# Altium PCB Motor-42.PcbDoc
Units mm, origin at the board's own origin, x right, y up, seen from the top; angles counter-clockwise.
Board outline 41.2 x 41.2 mm, 4 copper layers (Top1, Signal2, Gnd3, Bottom4), stack 0.778 mm thick; 84 components, 66 nets, 263 pads, 200 vias.
Unrouted connection lines stored in the file: 54.
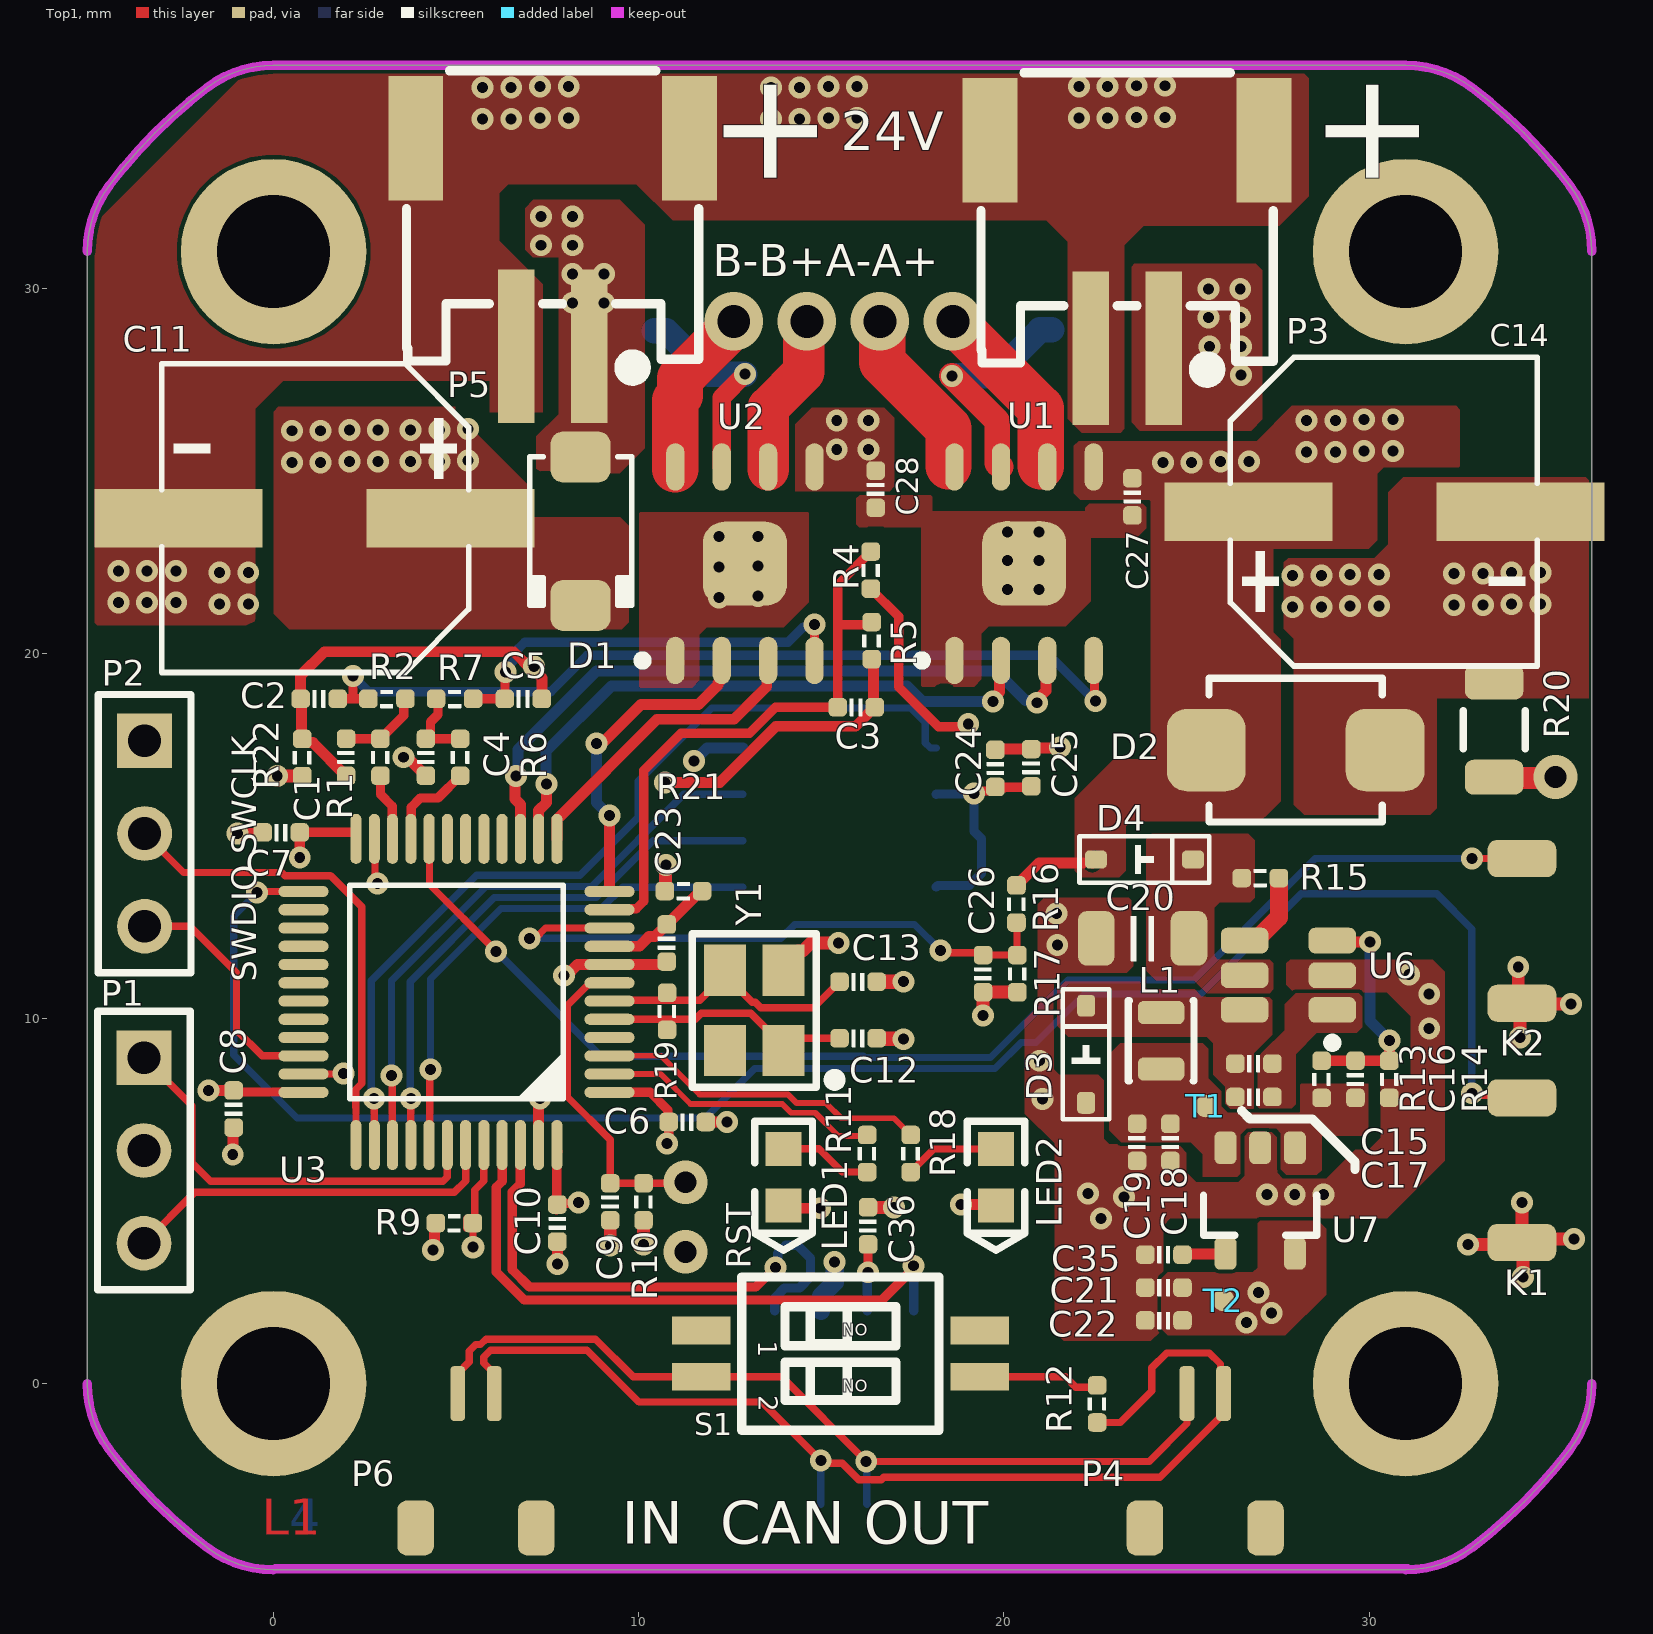
[diagram p0: Top1 view]
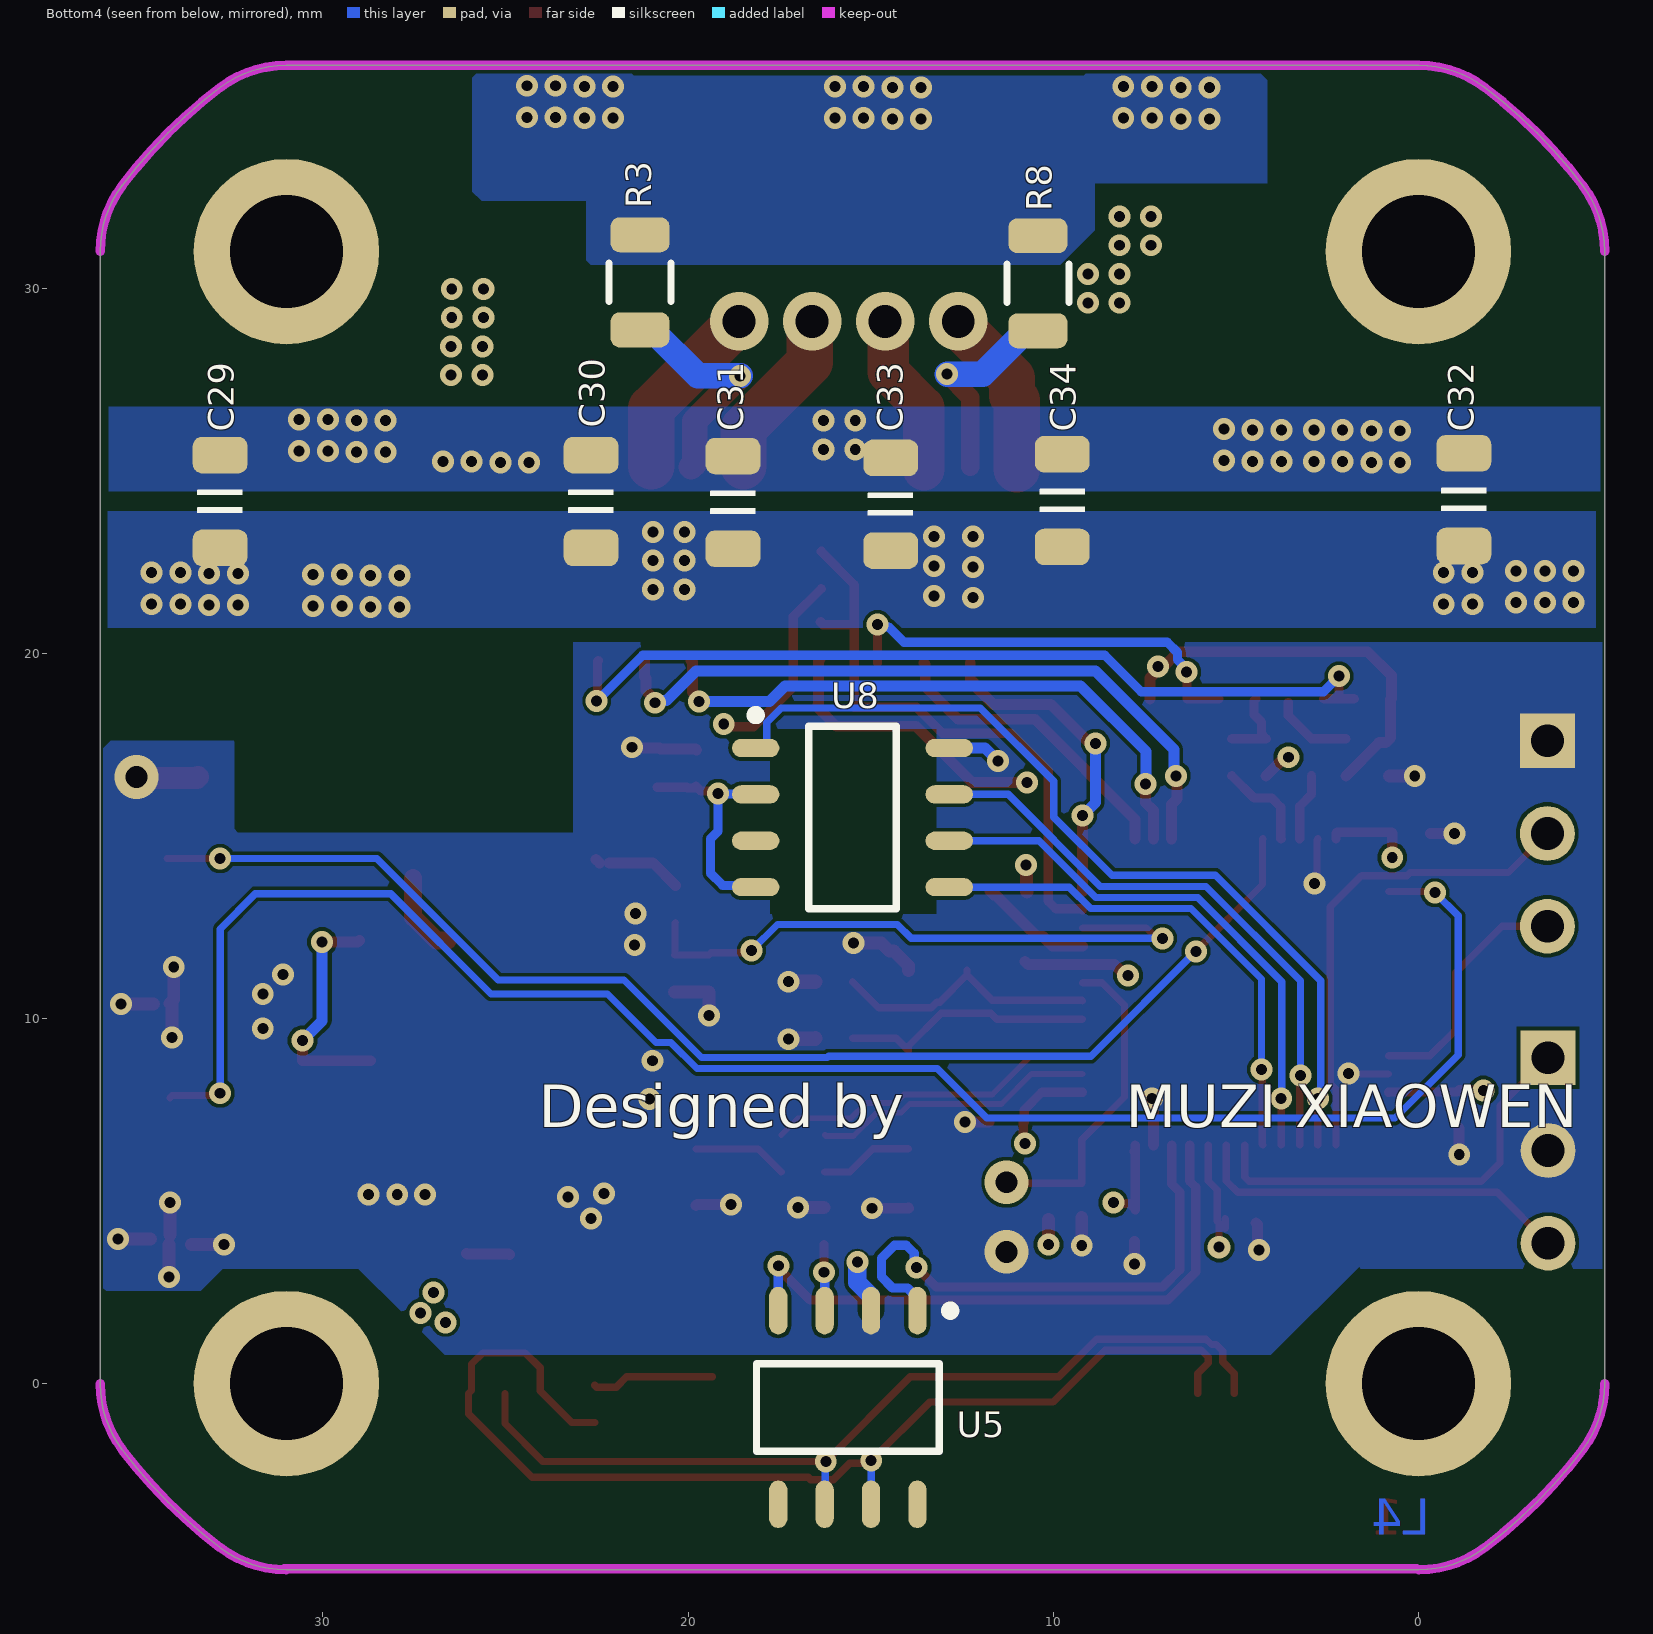
[diagram p1: Bottom4 view, seen from below]
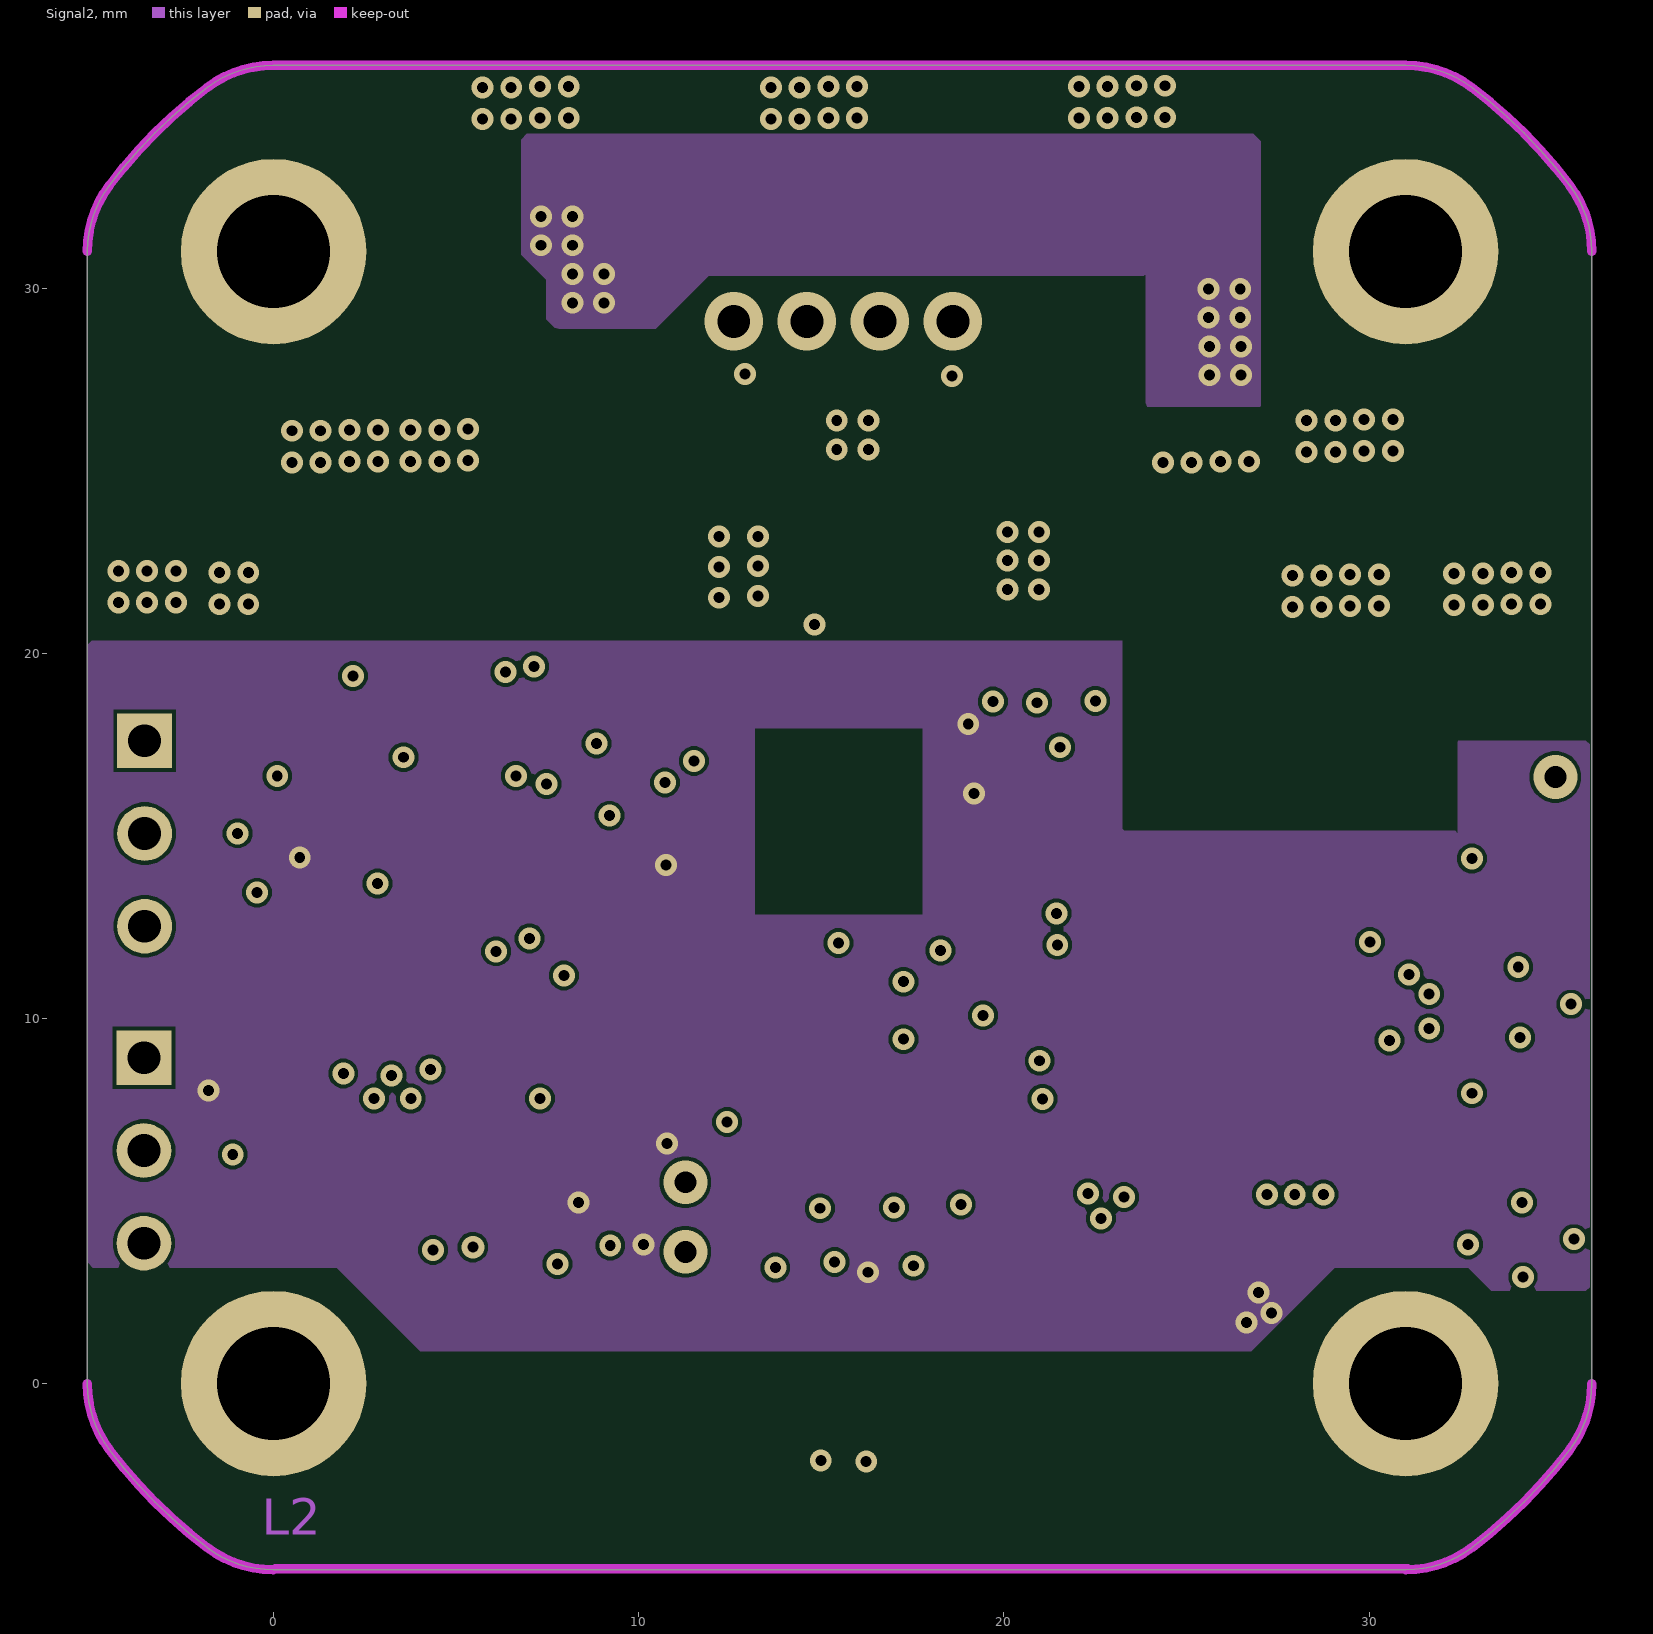
[diagram p2: Signal2]
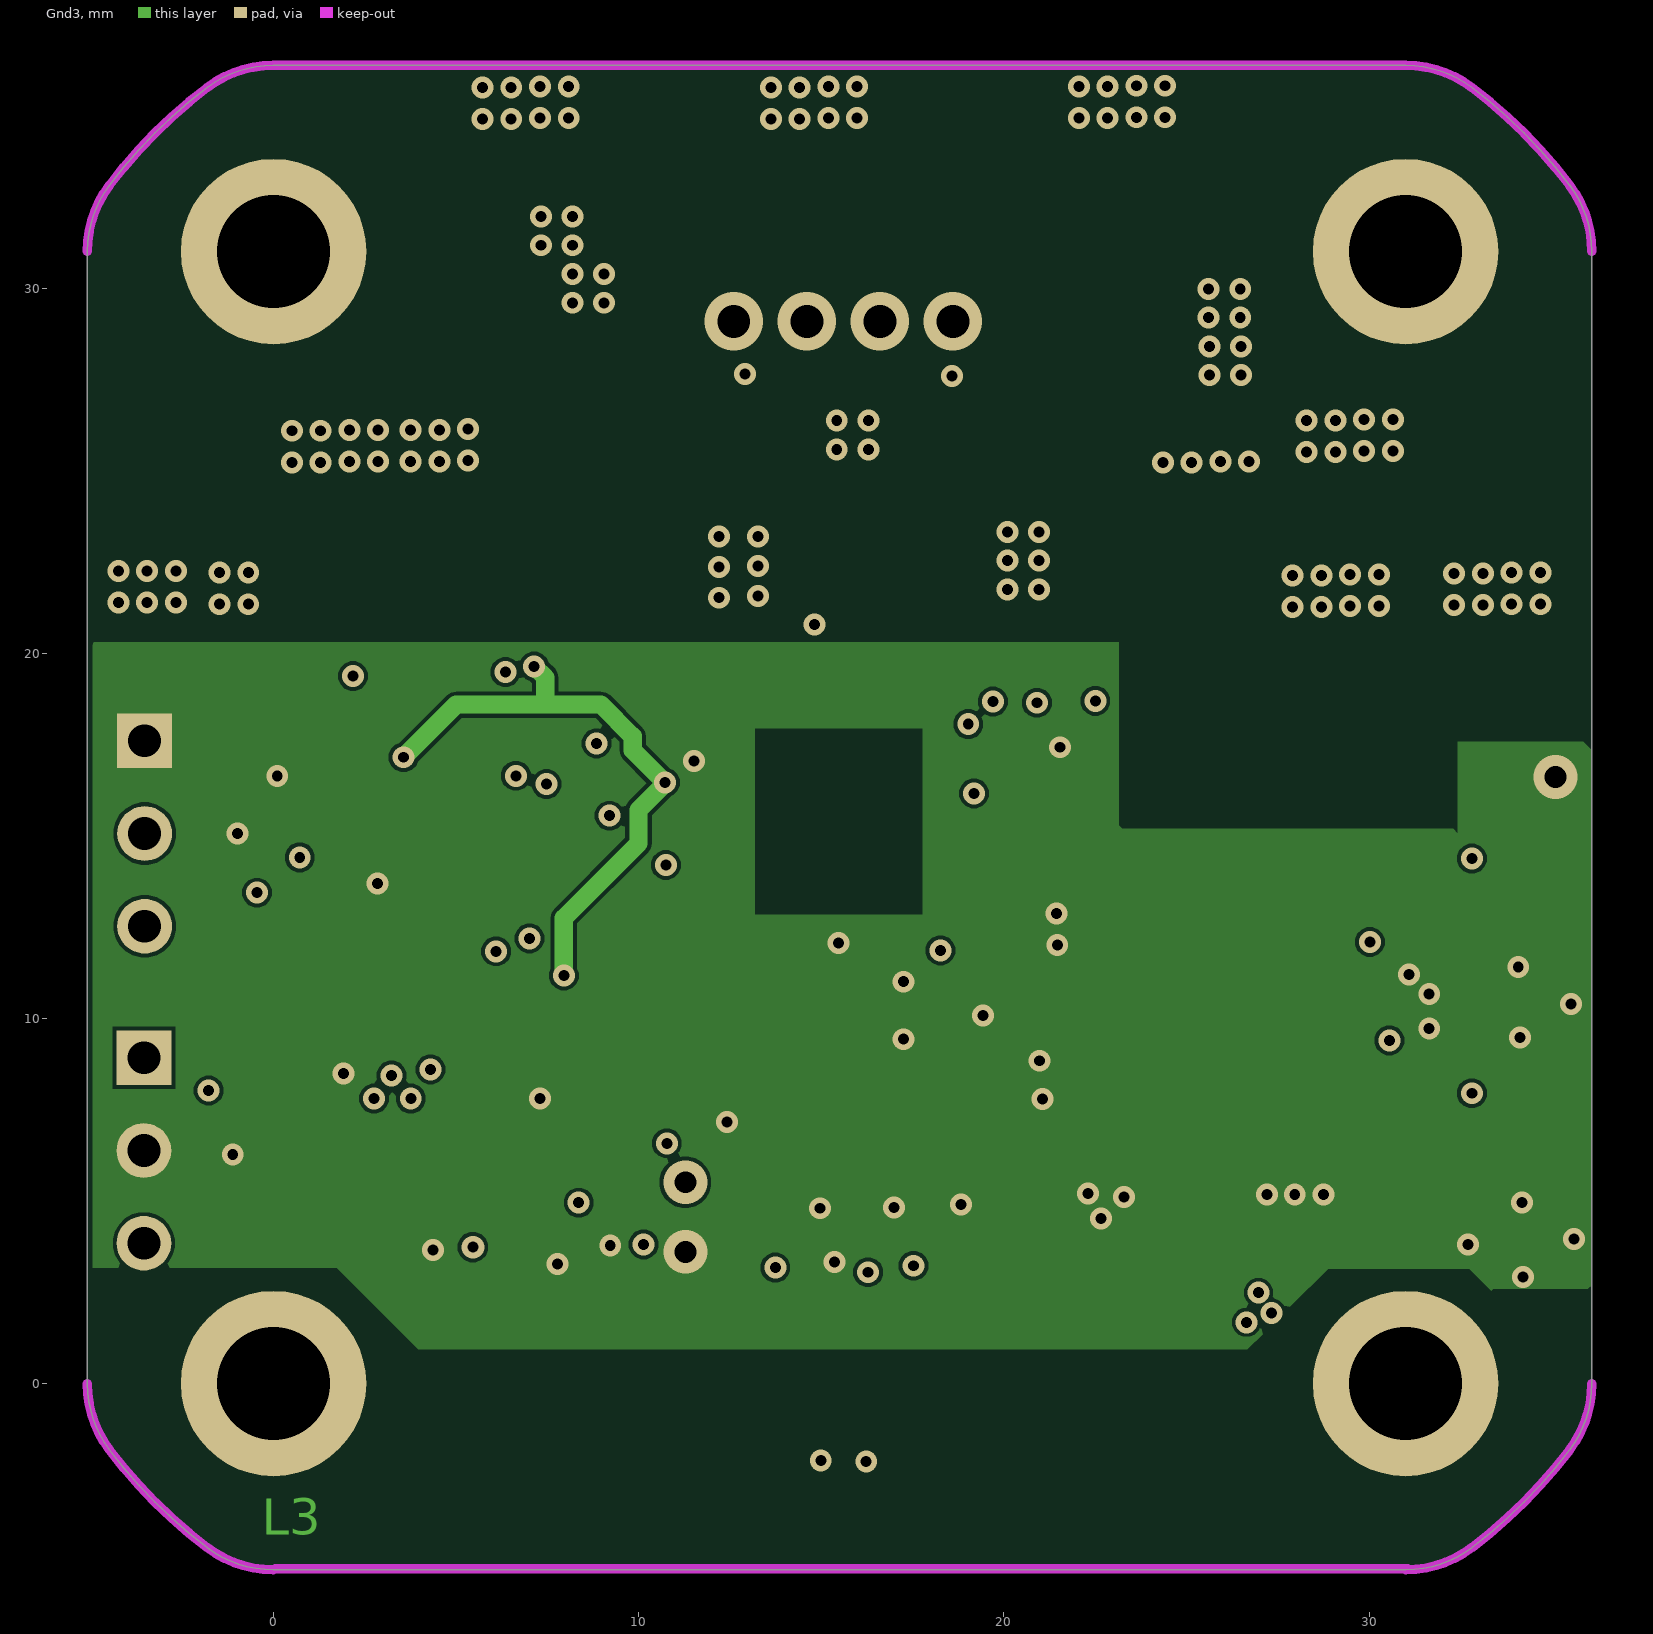
[diagram p3: Gnd3]
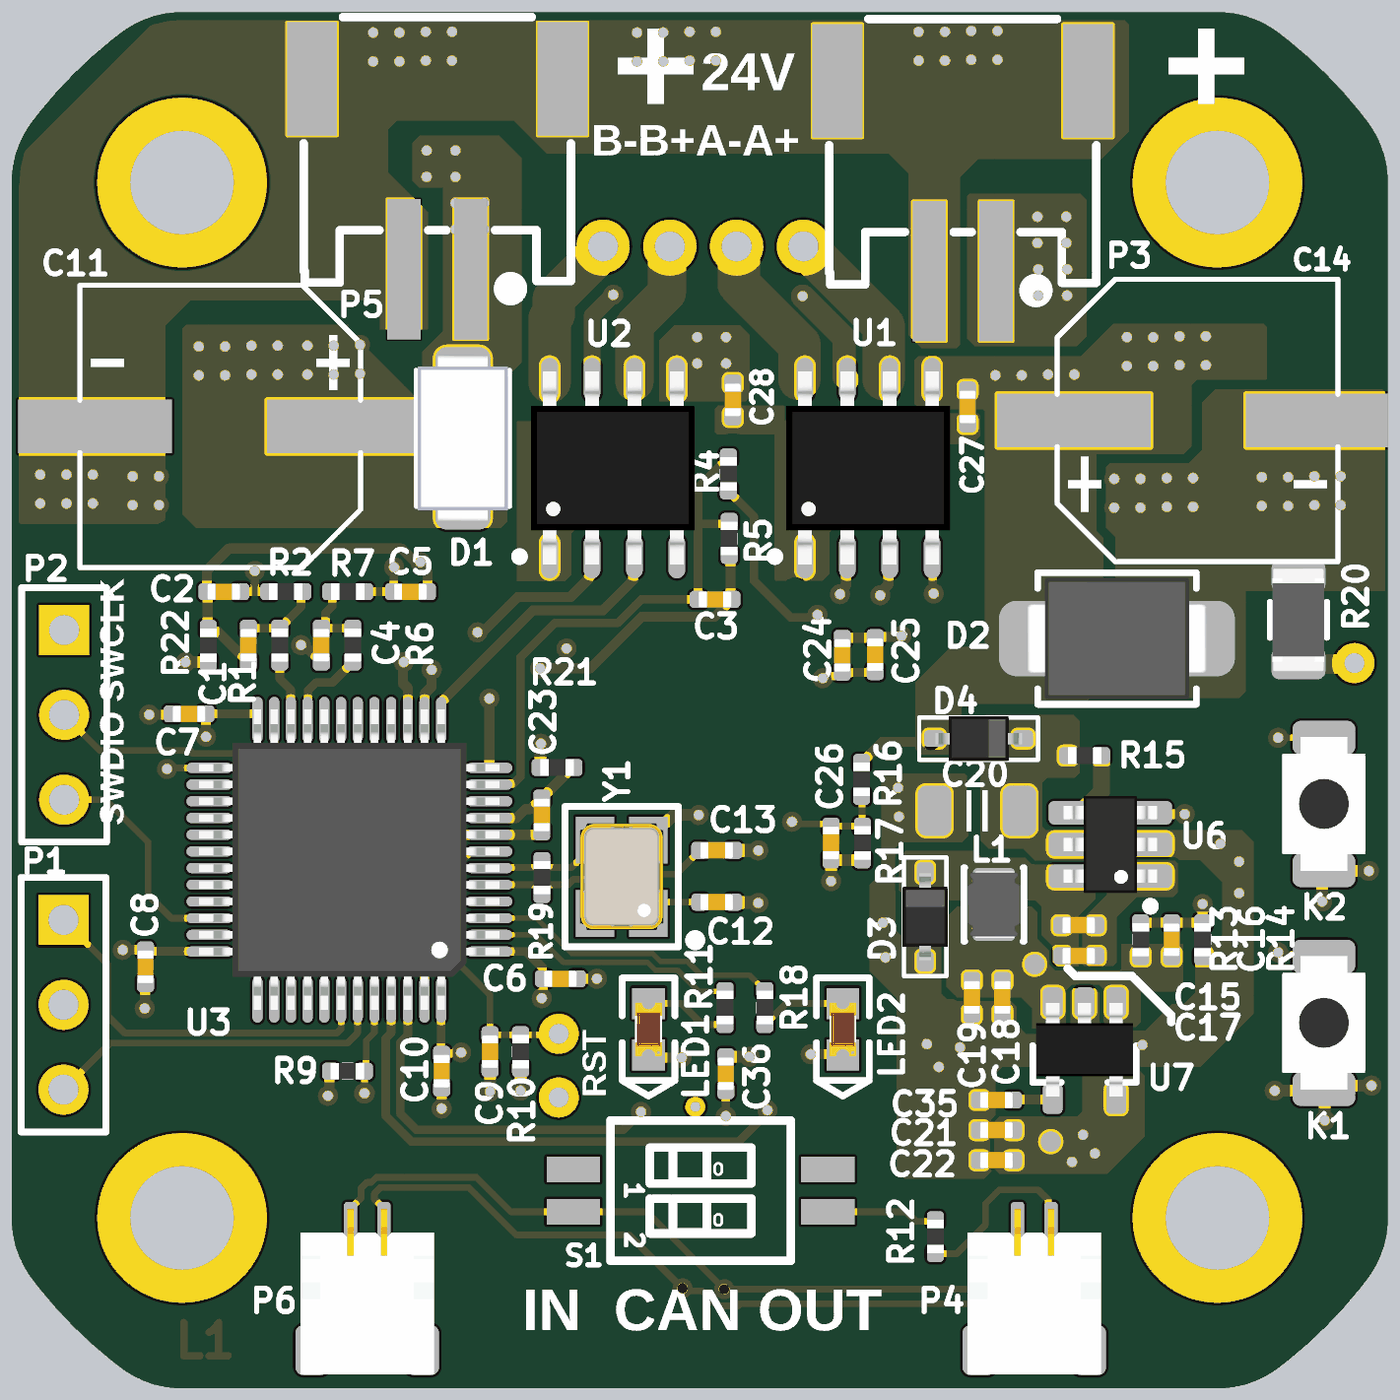
[diagram p4: 3D render of the assembled board from above, using the file's embedded part models]
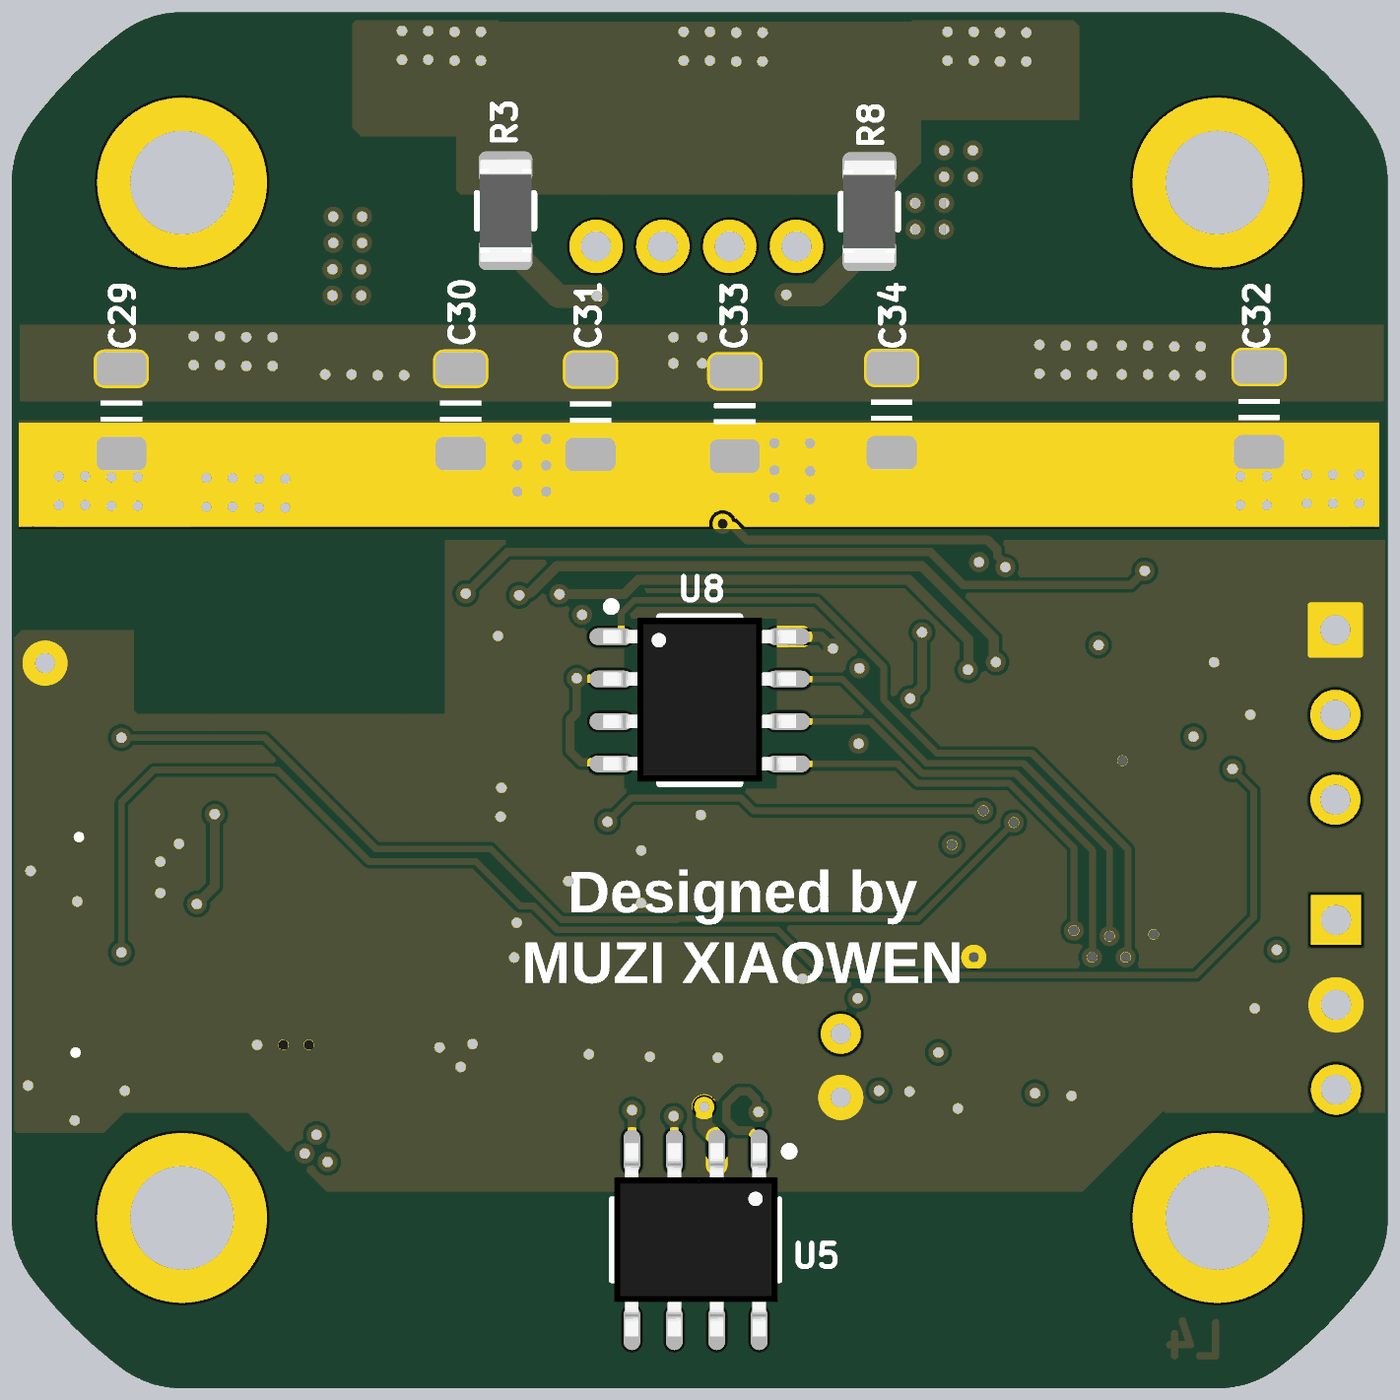
[diagram p5: 3D render of the assembled board from below, using the file's embedded part models]

## Layer stack, top to bottom
Top Solder: solder mask 0.0102, Solder Resist, Dk 3.5
Top1: signal copper 0.0356
Dielectric1: core 0.254, FR-4, Dk 4.2
Signal2: signal copper 0.036
Dielectric2: core 0.254, Dk 4.2
Gnd3: signal copper 0.036
Dielectric3: prepreg 0.127, Dk 4.2
Bottom4: signal copper 0.0356
Bottom Solder: solder mask 0.0102, Solder Resist, Dk 3.5

## Board outline
-4.493,-1.816 cw(c-2.1,-0.006) -5.1,-0.006 -5.1,23 -5.1,31.006 cw(c-2.1,31.006) -4.493,32.816 cw(c6.5,24.5) -1.816,35.493 cw(c-0.006,33.1) -0.006,36.1 31.006,36.1 cw(c31.006,33.1) 32.816,35.493 cw(c24.5,24.5) 35.493,32.816 cw(c33.1,31.006) 36.1,31.006 36.1,-0.006 cw(c33.1,-0.006) 35.493,-1.816 cw(c24.5,6.5) 32.816,-4.493 cw(c31.006,-2.1) 31.006,-5.1 -0.006,-5.1 cw(c-0.006,-2.1) -1.816,-4.493 cw(c6.5,6.5)

## Design rules (kind name [scope] priority, off if disabled: settings)
Clearance [All] p1: gap=0.102 ignorepadtopadclearanceinfootprint=FALSE except(0: Arc-Hole Track-Hole SMDPad-Hole THPad-Hole Via-Hole Fill-Hole Poly-Hole Region-Hole Text-Hole)
ComponentClearance [All] p1: gap=0 collisioncheckmode=3 verticalgap=0 showdistances=FALSE
DiffPairsRouting [All] p1: maxlimit=0.229 minlimit=0.229 mostfreqgap=0.229 toplayer_minwidth=0.381 toplayer_maxwidth=0.381 toplayer_prefwidth=0.381 midlayer1_minwidth=0.381 midlayer1_maxwidth=0.381 midlayer1_prefwidth=0.381 midlayer2_minwidth=0.381 midlayer2_maxwidth=0.381 midlayer2_prefwidth=0.381 bottomlayer_minwidth=0.381 bottomlayer_maxwidth=0.381 bottomlayer_prefwidth=0.381 maxuncoupledlength=12.7
FanoutControl Fanout_BGA [All] p1: bgadir=Out bgaviamode=Centered fanoutstyle=Auto fanoutdirection=Alternating viagrid=0.025 // Fanout_BGA (Default Rule)
HoleSize [All] p1: absolutevalues=TRUE maxlimit=254 minlimit=0.203 maxpercent=80.000 minpercent=20.000
MinimumSolderMaskSliver [All] p1 off: minsoldermaskwidth=0.051
PlaneClearance [All] p1: clearance=0.203
PlaneConnect [All] p1: planeconnectstyle=Direct reliefexpansion=0.508 reliefentries=4 reliefconductorwidth=0.254 reliefairgap=0.254
PolygonConnect [All] p1: connectstyle=Direct reliefconductorwidth=0.254 reliefentries=4 polygonreliefangle="90 Angle" airgapwidth=0.254
RoomDefinition Port [InComponentClass('Port')] p1 off: confinementstyle=ConfineIn formatcopy=TRUE lockcomponents=FALSE outline -160.798,-86.681 -109.998,-86.681 -109.998,-61.281 -160.798,-61.281
RoomDefinition MCU [InComponentClass('MCU')] p2 off: confinementstyle=ConfineIn formatcopy=TRUE lockcomponents=FALSE outline -160.798,-86.681 -109.998,-86.681 -109.998,-61.281 -160.798,-61.281
RoomDefinition Interface [InComponentClass('Interface')] p3 off: confinementstyle=ConfineIn formatcopy=TRUE lockcomponents=FALSE outline -160.798,-86.681 -109.998,-86.681 -109.998,-61.281 -160.798,-61.281
RoomDefinition Drive [InComponentClass('Drive')] p4 off: confinementstyle=ConfineIn formatcopy=TRUE lockcomponents=FALSE outline -160.798,-86.681 -109.998,-86.681 -109.998,-61.281 -160.798,-61.281
RoomDefinition Power [InComponentClass('Power')] p5 off: confinementstyle=ConfineIn formatcopy=TRUE lockcomponents=FALSE outline -160.798,-86.681 -109.998,-86.681 -109.998,-61.281 -160.798,-61.281
RoutingVias [All] p1: holewidth=0.203 width=0.406 viastyle="Through Hole" minholewidth=0.152 minwidth=0.305 maxholewidth=0.711 maxwidth=1.27
SilkToSilkClearance [All] p1: silktosilkclearance=0
SilkToSolderMaskClearance [IsPad] p1: minsilkscreentomaskgap=0 clearancetoexposedcopper=TRUE
SolderMaskExpansion [All] p1: expansion=0.076 istentingtop=FALSE
Width GND [(InNet('AGND') OR InNet('GND'))] p1: maxlimit=1.27 minlimit=0.102 preferedwidth=0.254
Width VCC [(InNet('VDD_SYS_3.3V') OR InNet('VDD_AV_3.3V') OR InNet('VDD_5V') OR InNet('VDD1V2-SYS') OR InNet('VDD1V1-EPHY') OR InNet('VDD-CPUX') OR InNet('VDD-CPUS') OR InNet('VDD-CPUFB') OR InNet('VCC-DRAM'))] p2: maxlimit=1.27 minlimit=0.102 preferedwidth=0.254
Width [All] p3: maxlimit=254 minlimit=0.102 preferedwidth=0.102
21 further rules are at their usual default settings.

## Classes and differential pairs
component class Port: C36 K1 K2 P1 P2 P3 P4 P5 P6 R12 S1 U5
component class MCU: C6 C7 C8 C9 C10 C12 C13 C23 LED1 LED2 R9 R10 R11 R18 R19 R21 R22 U3 Y1
component class Interface: C24 C25 C26 R16 R17 U8
component class Drive: C1 C2 C3 C4 C5 C27 C28 R1 R2 R3 R4 R5 R6 R7 R8 R20 U1 U2
component class Power: C11 C14 C15 C16 C17 C18 C19 C20 C21 C22 C29 C30 C31 C32 C33 C34 C35 D1 D2 D3 D4 L1 R13 R14 R15 T1 T2 U6 U7

## Components (designator, comment, footprint, x,y, rotation, side; value= is the part's Value field where it differs from the comment)
C1 "0.1uF" CAP_0402 1.987,17.151 r90 top value=0.1u
C2 "0.1uF" CAP_0402 1.251,18.751 r0 top value=0.1u
C3 "10uF" CAP_0402 15.957,18.523 r180 top value=0.1u
C4 "0.1uF" CAP_0402 4.172,17.151 r90 top value=0.1u
C5 "0.1uF" CAP_0402 6.839,18.751 r180 top value=0.1u
C6 "0.1uF" CAP_0402 11.328,7.163 r180 top value=0.1u
C7 "0.1uF" CAP_0402 0.209,15.094 r0 top value=0.1u
C8 "0.1uF" CAP_0402 -1.092,7.518 r90 top value=0.1u
C9 "0.1uF" CAP_0402 9.22,4.978 r90 top value=0.1u
C10 "10uF" CAP_0402 7.772,4.394 r90 top value=0.1u
C11 "220uF/25V" CAP-SMD_BD8.0-L8.3-W8.3-LS9.3-FD 1.118,23.698 r180 top value=220uF/35V
C12 "20pF" CAP_0402 16.008,9.455 r0 top
C13 "20pF" CAP_0402 16.008,11.004 r0 top
C14 "220uF/25V" CAP-SMD_BD8.0-L8.3-W8.3-LS9.3-FD 30.429,23.876 r0 top value=220uF/35V
C15 "0.1uF" CAP_0402 26.848,8.763 r0 top value=0.1u
C16 "100pF" CAP_0402 29.629,8.331 r90 top value=0.1u
C17 "0.1uF" CAP_0402 26.848,7.849 r0 top value=0.1u
C18 "0.1uF" CAP_0402 24.562,6.604 r90 top value=0.1u
C19 "10uF" CAP_0402 23.647,6.604 r90 top value=0.1u
C20 "10uF/50V" 1206-CAP 23.8,12.192 r0 top value=0.1u
C21 "0.1uF" CAP_0402 24.384,2.629 r0 top value=0.1u
C22 "10uF" CAP_0402 24.384,1.727 r0 top value=0.1u
C23 "0.1uF" CAP_0402 10.77,12.065 r90 top value=0.1u
C24 "10uF" CAP_0402 19.767,16.846 r270 top value=0.1u
C25 "0.1uF" CAP_0402 20.752,16.866 r270 top value=0.1u
C26 "0.1uF" CAP_0402 19.431,11.227 r90 top value=0.1u
C27 "0.1uF" CAP_0402 23.52,24.282 r90 top value=0.1u
C28 "0.1uF" CAP_0402 16.491,24.492 r90 top value=0.1u
C29 "10uF/50V" 1206-CAP 32.817,24.155 r270 bottom
C30 "10uF/50V" 1206-CAP 22.657,24.155 r270 bottom
C31 "10uF/50V" 1206-CAP 18.771,24.13 r270 bottom
C32 "10uF/50V" 1206-CAP -1.245,24.206 r270 bottom
C33 "10uF/50V" 1206-CAP 14.453,24.079 r270 bottom
C34 "10uF/50V" 1206-CAP 9.754,24.181 r270 bottom
C35 "0.1uF" CAP_0402 24.384,3.531 r0 top value=0.1u
C36 "0.1uF" CAP_0402 16.281,4.318 r270 top value=0.1u
D1 "SS54" DO-214AC 8.407,23.343 r270 top
D2 "SMBJ28CA" SMBJ-CA_MFG 27.991,17.348 r180 top
D3 "二极管-5819W" SOD-323 22.25,9.017 r90 top
D4 "二极管-5819W" SOD-323 23.851,14.351 r0 top
K1 "TACT 2P" ButtonTACT_3x4x2_180 34.188,5.842 r90 top value=3x4
K2 "TACT 2P" ButtonTACT_3x4x2_180 34.188,12.395 r90 top value=3x4
L1 "6.8uH" IND-201612 24.308,9.384 r270 top
LED1 "LED GREEN" LED-0603 13.919,5.639 r90 top
LED2 "LED GREEN" LED-0603 19.736,5.639 r90 top
P1 "Header 3" HDR1X3 -3.55,8.921 r270 top
P2 "Header 3" HDR1X3 -3.531,17.602 r270 top
P3 "Header 4" CONN-SMD_2P-P2.00_HDGC_HDGC2001WR-S-2P 23.374,31.197 r180 top
P4 "SH1.0-2P" SH1.0-2P 25.516,-0.273 r0 top
P5 "Header 4" CONN-SMD_2P-P2.00_HDGC_HDGC2001WR-S-2P 7.642,31.253 r180 top locked
P6 "SH1.0-2P" SH1.0-2P 5.543,-0.273 r0 top
R1 "1K" RES_0402 2.927,17.151 r90 top value=22R
R2 "1K" RES_0402 3.105,18.751 r180 top value=22R
R3 "0.1R" 1206-RES 21.317,30.156 r90 bottom value=22R
R4 "NCP15XH103F03RC" RES_0402 16.358,22.276 r270 top value=10k
R5 "3.3K" RES_0402 16.383,20.345 r90 top value=22R
R6 "1K" RES_0402 5.111,17.151 r90 top value=22R
R7 "1K" RES_0402 4.959,18.751 r0 top value=22R
R8 "0.1R" 1206-RES 10.42,30.13 r90 bottom value=22R
R9 "10K" RES_0402 4.953,4.394 r180 top value=22R
R10 "10K" RES_0402 10.135,4.978 r270 top value=22R
R11 "1K" RES_0402 16.256,6.299 r270 top value=22R
R12 "120R" RES_0402 22.555,-0.559 r90 top value=22R
R13 "10K" RES_0402 28.702,8.331 r270 top value=22R
R14 "1.8K" RES_0402 30.556,8.331 r90 top value=22R
R15 "1M" RES_0402 27.026,13.843 r0 top value=22R
R16 "10K" RES_0402 20.345,13.132 r270 top value=22R
R17 "1K" RES_0402 20.371,11.227 r270 top value=22R
R18 "1K" RES_0402 17.45,6.299 r270 top value=22R
R19 "1M" RES_0402 10.776,10.191 r270 top value=22R
R20 "0R" 1206-RES 33.426,17.907 r90 top
R21 "0" RES_0402 11.227,13.487 r180 top value=0R
R22 "0" RES_0402 0.787,17.145 r90 top value=0R
S1 "SW DIP-2" SW-SMD_DSHP02TS-S 15.525,0.819 r270 top
T1 "测试点" TEST_PT 25.527,7.594 r0 top
T2 "测试点" TEST_PT 26.01,2.286 r90 top
U1 "TB67H450FNG" SO-8-PAD 20.555,22.451 r0 top locked
U2 "TB67H450FNG" SO-8-PAD 12.909,22.451 r0 top locked
U3 "STM32F103CBT6" LQFP-48 5.01,10.725 r0 top locked
U5 "SN65HVD232D" so-8 15.627,-0.654 r90 bottom
U6 "ME3116" SOT23-6 27.794,11.182 r90 top
U7 "LP2992 3V3" SOT23-5 27.02,4.958 r180 top
U8 "MT6816" SO-8 15.5,15.5 r180 bottom locked
Y1 "XTAL-4" LC-SMD-3225_4P 13.163,10.217 r90 top value="12 MHz"

## Footprints (in the part's own frame and the unit in brackets; to place one, negate y for a bottom-side part, rotate by r counter-clockwise, add the part's x,y. Pads: shape width x height; smd on the part's side, far side on the other; paste and mask are expansions set on the pad)
1206-CAP [mm]
  rrect50% 1x1.5 smd: 1(-1.27,0) 2(1.27,0)
  silkscreen extent -0.3,-0.61 0.3,0.61, body extent -1.5,-0.75 1.5,0.75, height 1.5
1206-RES [mm]
  rrect50% 0.956x1.61 smd paste+0 mask+0: 1(-1.301,0) 2(1.301,0)
  silkscreen extent -0.52,-0.85 0.52,0.85, body extent -1.55,-0.77 1.55,0.77, height 0.65
ButtonTACT_3x4x2_180 [mil]
  rrect50% 40x74 smd: 1(-78,0) 2(78,0)
  body extent -79,-49 79,49, height 63
CAP-SMD_BD8.0-L8.3-W8.3-LS9.3-FD [mm]
  rect 4.6x1.6 smd: 1(-3.724,0) 2(3.724,0)
  silkscreen extent -4.23,-4.23 4.18,4.23
CAP_0402 [mil]
  rrect50% 20x20 smd: 1(-20,0) 2(20,0)
  silkscreen extent -7,-9 7,9, body extent -20,-10 20,10, height 20
CONN-SMD_2P-P2.00_HDGC_HDGC2001WR-S-2P [mm]
  rect 1x4.2 smd paste+0 mask+0.05: 1(-1,2.85) 2(1,2.85)
  rect 1.5x3.4 smd paste+0 mask+0.05: 3(3.75,-2.85) 4(-3.75,-2.85)
  silkscreen extent -4,-4.7 4,3.68
DO-214AC [mil] "SMA"
  rrect50% 55x65 smd: 1(-80,0) 2(80,0)
  silkscreen extent -80,-55 80,55, body extent -98,-53 98,53, height 85
HDR1X3 [mm] "Connector; Header; 3 Position"
  rect 1.5x1.5 hole 0.9: 1(0,0)
  round 1.5 hole 0.9: 2(2.54,0) 3(5.08,0)
  silkscreen extent -1.27,-1.27 6.35,1.27
IND-201612 [mm]
  rrect50% 0.635x1.27 smd paste+0 mask+0: 1(-0.774,0) 2(0.774,0)
  silkscreen extent -1.1,-0.9 1.1,0.9, body extent -1,-0.8 1,0.8, height 0.95
LC-SMD-3225_4P [mm]
  rect 1.4x1.15 smd: 1(-1.1,-0.8) 2(1.1,-0.8) 3(1.1,0.8) 4(-1.1,0.8)
  silkscreen extent -2.1,-2.35 2.1,1.7, body extent -1.6,-1.25 1.6,1.25, height 0.61
LED-0603 [mm]
  rect 0.93x0.98 smd: A(0.782,-0.048) C(-0.758,-0.048)
  silkscreen extent -1.99,-0.84 1.55,0.74, body extent -0.79,-0.45 0.81,0.35, height 0.6
LQFP-48 [mil]
  oval 54x12 smd: 1(165,-108.27) 2(165,-88.58) 3(165,-68.9) 4(165,-49.21) 5(165,-29.53) 6(165,-9.84) 7(165,9.84) 8(165,29.53) 9(165,49.21) 10(165,68.9) 11(165,88.58) 12(165,108.27) 25(-165,108.27) 26(-165,88.58) 27(-165,68.9) 28(-165,49.21) 29(-165,29.53) 30(-165,9.84) 31(-165,-9.84) 32(-165,-29.53) 33(-165,-49.21) 34(-165,-68.9) 35(-165,-88.58) 36(-165,-108.27)
  oval 12x54 smd: 13(108.27,165) 14(88.58,165) 15(68.9,165) 16(49.21,165) 17(29.53,165) 18(9.84,165) 19(-9.84,165) 20(-29.53,165) 21(-49.21,165) 22(-68.9,165) 23(-88.58,165) 24(-108.27,165) 37(-108.27,-165) 38(-88.58,-165) 39(-68.9,-165) 40(-49.21,-165) 41(-29.53,-165) 42(-9.84,-165) 43(9.84,-165) 44(29.53,-165) 45(49.21,-165) 46(68.9,-165) 47(88.58,-165) 48(108.27,-165)
  silkscreen extent -115,-115 115,115, body extent -177,-177 177,177, height 61
RES_0402 [mil]
  rrect50% 20x20 smd: 1(-20,0) 2(20,0)
  silkscreen extent -7,-10 7,10, body extent -20,-10 20,10, height 14
SH1.0-2P [mm]
  rrect50% 0.4x1.5 smd: 1(-0.5,0) 2(0.5,0)
  rrect50% 1x1.5 smd: SH1(-1.651,-3.683) SH2(1.651,-3.683)
  body extent -2,-4.42 2,0.54, height 3.06
SMBJ-CA_MFG [mm]
  rrect50% 2.16x2.26 smd paste+0 mask+0: 1(-2.45,0) 2(2.45,0)
  silkscreen extent -2.37,-1.97 2.37,1.97, body extent -2.7,-1.81 2.7,1.81, height 2.62
so-8 [mm]
  oval 1.3x0.5 smd: 1(2.65,-1.905) 2(2.65,-0.635) 3(2.65,0.635) 4(2.65,1.905) 5(-2.65,1.905) 6(-2.65,0.635) 7(-2.65,-0.635) 8(-2.65,-1.905)
  silkscreen extent -1.2,-2.93 2.77,2.5, body extent -2.89,-2.46 2.89,2.44, height 1.45
SO-8 [mm]
  oval 1.3x0.5 smd: 1(-2.65,1.905) 2(-2.65,0.635) 3(-2.65,-0.635) 4(-2.65,-1.905) 5(2.65,-1.905) 6(2.65,-0.635) 7(2.65,0.635) 8(2.65,1.905)
  silkscreen extent -2.78,-2.5 1.2,2.93, body extent -2.89,-2.44 2.89,2.46, height 1.45
SO-8-PAD [mm]
  oval 0.5x1.3 smd: 1(-1.905,-2.65) 2(-0.635,-2.65) 3(0.635,-2.65) 4(1.905,-2.65) 5(1.905,2.65) 6(0.635,2.65) 7(-0.635,2.65) 8(-1.905,2.65)
  rrect50% 2.3x2.3 smd: 9(0,0)
  silkscreen extent -2.93,-2.77 -2.68,-2.53, body extent -2.46,-2.89 2.44,2.89, height 1.45
SOD-323 [mm]
  rrect50% 0.6x0.5 smd: 1(-1.329,0) 2(1.329,0)
  silkscreen extent -1.78,-0.64 1.78,0.64, body extent -1.3,-0.68 1.3,0.67, height 1.15
SOT23-5 [mm] "SOT23, 3-Leads, Body 3.1x3.0mm (max), Pitch 0.95mm, IPC Medium Density"
  rrect50% 0.6x0.889 smd: 1(-0.95,-1.5) 2(0,-1.5) 3(0.95,-1.5) 4(0.95,1.396) 5(-0.95,1.396)
  silkscreen extent -1.55,-0.2 1.55,0.9, body extent -1.45,-1.48 1.45,1.32, height 1.2
SOT23-6 [mm]
  rrect50% 0.7x1.3 smd: 1(-0.95,-1.2) 2(0,-1.2) 3(0.95,-1.2) 4(0.95,1.2) 5(0,1.2) 6(-0.95,1.2)
  silkscreen extent -1.97,-1.33 -1.73,-1.08, body extent -1.45,-1.4 1.45,1.4, height 1.45
SW-SMD_DSHP02TS-S [mm]
  rect 0.762x1.6 smd: 1(0.635,3.81) 2(-0.635,3.81) 3(-0.635,-3.81) 4(0.635,-3.81)
  silkscreen extent -2.1,-2.7 2.1,2.7
TEST_PT [mm]
  rrect100% 0.606x0.606 smd: 0(0,0)

## Part data
C1 C2 C3 C4 C5 C6 C7 C8 C9 C10 C12 C13 C15 C16 C17 C18 C19 C20 C21 C22 C23 C24 C25 C26 C27 C28 C35 C36: library part 电容-0402, "Capacitor"
C11 C14 C29 C30 C31 C32 C33 C34: library part CAP, "Capacitor, chip, ceramic", Parameters="E22 CAP", PN=RVT1E221M0607, Price=0.038
D1: library part Diode_SMA, "Diode", Type=SMA
D3 D4: "40V"
K1 K2: library part ButtonTACT_3x4x2_180, "Button", Type="TACT 2P"
L1: library part 电感-201612
LED1 LED2: library part LED, "LED GRN SGL RA 25mA 4.1V SMD", AGILE_PN=370-76642, CAD_APPROVED=Yes, CLASS=IC, HEIGHT=4.25MM, MFG_NAME01=Kingbright, MFG_PN01=AA4040ZGS, PN=19-217/G7C-AN1P2/3T, RoHS=Yes
P1 P2: "Header, 3-Pin", LatestRevisionDate=17-Jul-2002, LatestRevisionNote="Re-released for DXP Platform.", Publisher="Altium Limited"
P3 P5: "Header, 4-Pin", LatestRevisionDate=17-Jul-2002, LatestRevisionNote="Re-released for DXP Platform.", Publisher="Altium Limited"
R1 R2 R5 R6 R7 R9 R10 R11 R12 R13 R14 R15 R16 R17 R18 R19 R21 R22: library part 电阻-0402, "Resistor"
R3 R8 R20: library part 电阻-1206, "Resistor"
R4: "THERMISTOR 10K OHM NTC 0402 SMD"
S1: "DIP Switch, 2 Position, SPST", LatestRevisionDate=17-Jul-2002, LatestRevisionNote="Re-released for DXP Platform.", PackageReference=DIP-4, Published=24-Mar-1999, Publisher="Altium Limited"
U1 U2: "PWM Chopper Type DC Brushed Motor Driver"
U3: "ARM Cortex-M3 32-bit MCU, 128 KB Flash, 20 KB Internal RAM, 37 I/Os, 48-pin LQFP, -40 to 85 degC, Tray", I/Os (High Current)=37, Operating Frequency(F) (Processor speed) (MHz)=72, Supplier Part Number 1=497-6288-ND, Supply Voltage(Vcc) min (V)=2, A/D Converter="2x12-bit (10 Channel)", ComponentLink1Description="Manufacturer URL", ComponentLink1URL=http://www.st.com/web/en/home.html, ComponentLink2Description=Datasheet, ComponentLink2URL=http://www.st.com/st-web-ui/static/active/en/resource/technical/document/datasheet/CD00161566.pdf, ComponentLink3Description="Package Specification", ComponentLink3URL=http://www.st.com/st-web-ui/static/active/en/resource/technical/document/datasheet/DM00058181.pdf, Core="ARM Cortex-M3", DatasheetVersion="Rev. 16", FLASH Size (Prog) (kB)=128, Internal RAM Size (kB)=20, Mounting Technology="Surface Mount", PackageDescription="48-Pin Low Profile Quad Flat Package, 7 x 7 mm Body, 0.5 mm Pitch", PackageReference=LQFP48, PackageVersion="Rev. 6, 06/2013", Packing=Tray, PartNumber=STM32F103CBT6, Supplier 1=Digi-Key, Supplier 2=Farnell, Supplier 3=Newark, Supplier 4=Newark, Supplier 5=Mouser, Supplier Part Number 2=1606327, Supplier Part Number 3=11N8296, Supplier Part Number 4=57P1214, Supplier Part Number 5=511-STM32F103CBT6
U5: Manufacturer="Texas Instruments", Manufacturer Part Number=SN65HVD232DR, Operating Temperature="-40°C ~ 85°C", Package / Case="8-SOIC (0.154\", 3.90mm Width)", Supplier Device Package=8-SOIC, Supplier Part Number 1=296-26344-2-ND, Voltage - Supply="3 V ~ 3.6 V", Category="Integrated Circuits (ICs)", ComponentLink1Description=http://www.ti.com/lit/ds/symlink/sn65hvd230.pdf, ComponentLink1URL=http://www.ti.com/lit/ds/symlink/sn65hvd230.pdf, Data Rate=1Mbps, Duplex=Half, Mounting Type="Surface Mount", Number of Drivers/Receivers=1/1, Packaging="Tape & Reel (TR)", Part Status=Active, Pricing 1="2500=0.84375 (USD)", Pricing 2="1=2.05, 10=1.842, 100=1.4809, 500=1.21668, 1000=1.00811 (USD)", Protocol=CAN, RoHS="RoHS Compliant", Stock=5000, Supplier 1=Digi-Key, Supplier 2=Digi-Key, Supplier Part Number 2=296-26344-1-ND, Type=Transceiver
U6: "DC-DC"
U7: library part LP2992, "LDO"
U8: "Magnetic Position Sensor"
Y1: "Crystal", Distributors=Comet, Parameters="20ppm 20pF -20/+70C", Price=0.238

## Free pads (board coordinates)
  round 5.08 hole 3.1: ""(0,0) ""(0,31) ""(31,0) ""(31,31)

## Via types
v1: diameter 0.6, hole 0.3, Top1 to Bottom4, tented both sides, 190 vias
v2: diameter 1.6, hole 0.9, Top1 to Bottom4, 4 vias
v3: diameter 1.2, hole 0.6, Top1 to Bottom4, 3 vias
v4: diameter 0.6, hole 0.3, Top1 to Bottom4, 2 vias
v5: diameter 0.62, hole 0.3, Top1 to Bottom4, tented bottom, 1 vias

## Nets (pads, with @x,y where several pads share a name; then routed paths per layer and width w, separated by ;. In a path a pad name is that pad's centre, name@x,y a point inside that pad or via, vN(x,y) a via of type N, cw(c..) or ccw(c..) an arc to the next point about the centre after c; other vN are vias at no path point)
ADC_ENC: U3.16
AGND: C1.1 C2.1 C3.1 C4.1 C5.1 C23.1 R5.1 R22.2 U3.8 | length 39.3
  Top1 w0.3: C1.1 1.081,17.549 0.891,17.549 R22.2 0.765,17.675 0.765,18.729 C2.1 0.743,19.386 1.397,20.041 6.579,20.041 v1@7.061,19.558 ; v1(3.562,17.151) 3.619,17.094 3.721,17.094 C4.1 ; v1(7.137,19.634) 7.195,19.577 7.195,19.475 7.347,19.323 C5.1 ; v1(7.95,11.176) 8.031,11.176 8.329,11.474 9.2,11.474 U3.8 U3.8 10.688,11.476 C23.1 ; v1(10.72,16.459) 12.219,16.459 13.76,18 15.943,18 C3.1 16.424,18.564 16.424,19.796 R5.1
  Gnd3 w0.5: v1(3.562,17.151) 5.004,18.593 7.442,18.593 ; v1(7.137,19.634) 7.442,19.329 7.442,18.593 ; v1(7.95,11.176) 7.95,12.751 9.994,14.794 9.994,15.706 10.72,16.432 v1(10.72,16.459) 9.834,17.346 9.834,17.725 8.966,18.593 7.442,18.593
BUTTON_1: K1.2 U3.25 | length 49.4
  Top1 w0.2: v1@-0.356,13.475 U3.25 ; v1(32.817,7.95) 32.88,7.887 34.125,7.887 K1.2
  Bottom4 w0.2: v1(-0.451,13.443) -1.086,12.808 -1.086,8.998 0.641,7.27 11.819,7.27 13.175,8.626 19.759,8.626 20.473,9.341 20.879,9.341 22.206,10.668 25.4,10.668 28.143,13.411 31.852,13.411 32.817,12.446 v1(32.817,7.95)
BUTTON_2: K2.2 U3.20 | length 35.5
  Top1 w0.2: U3.20 4.268,14.907 4.268,13.664 v1(6.096,11.836) ; v1(32.817,14.376) K2.2 K2.2@34.265,14.376
  Bottom4 w0.2: v1(6.096,11.836) 8.966,8.966 16.153,8.966 16.192,8.928 19.634,8.928 21.755,11.049 25.197,11.049 28.524,14.376 v1(32.817,14.376)
CAN_H: P4.2 P6.2 R12.1 U5.7 | length 30.9
  Top1 w0.2: P6.2 6.043,0.277 5.757,0.562 5.757,0.728 5.944,0.914 8.585,0.914 10.008,-0.508 13.386,-0.508 v1(14.986,-2.108) 15.063,-2.185 15.572,-2.185 16.023,-2.635 16.643,-2.635 16.713,-2.565 24.274,-2.565 26.016,-0.823 P4.2 25.933,-0.191 25.933,0.533 25.629,0.838 24.46,0.838 24.054,0.432 24.054,-0.203 23.19,-1.067 R12.1
  Bottom4 w0.2: v1(14.986,-2.108) 14.989,-2.111 14.989,-3.301 U5.7
CAN_L: P4.1 P6.1 S1.4 U5.6 | length 24.9
  Top1 w0.2: P6.1 5.043,0.277 5.359,0.593 5.359,0.889 5.537,1.067 5.669,1.067 5.819,1.216 8.817,1.216 9.849,0.184 13.913,0.184 v1(16.231,-2.134) 23.978,-2.134 25.016,-1.096 P4.1
  Bottom4 w0.2: v1(16.231,-2.134) 16.246,-2.149 16.246,-3.289 U5.6
CAN_RX: U3.45 U5.4 | length 17
  Top1 w0.254: U3.45 6.26,5.538 6.096,5.375 6.096,3.053 6.863,2.286 16.662,2.286 17.526,3.15 v1(17.526,3.226)
  Bottom4 w0.254: v1(17.526,3.226) 17.529,3.223 17.529,1.999 U5.4
CAN_TX: U3.46 U5.1 | length 14.8
  Top1 w0.254: U3.46 6.76,5.467 6.538,5.246 6.538,3.114 7.01,2.642 13.208,2.642 v1(13.741,3.175)
  Bottom4 w0.254: U5.1 13.722,2.344 13.994,2.616 14.402,2.616 14.707,2.921 14.707,3.429 14.351,3.785 14.024,3.785 13.805,3.566 13.805,3.239 v1(13.741,3.175)
GND: C6.1 C7.1 C8.1 C9.1 C10.1 C12.2 C13.2 C18.1 C19.1 C20.1 C21.1 C22.1 C24.1 C25.1 C26.1 C35.1 C36.1 D3.1 K1.1 K2.1 LED1.C LED2.C P1.2 P2.1 R9.2 R14.1 R17.2 R20.1 R22.1 U3.23 U3.35 U3.47 U5.2 U6.2 U7.2 U8.8 Y1.2 | length 28.4
  Top1 w0.2: U3.35 v1@1.82,8.475 ; U3.23 2.78,14.896 2.78,13.756 v1(2.845,13.691)
  Top1 w0.3: v1(-1.118,6.274) -1.105,6.286 -1.105,6.998 C8.1 ; v1@-0.807,15.068 C7.1@-0.324,15.068 ; v1(4.369,3.658) 4.407,3.696 4.407,4.356 R9.2 ; U3.47 U3.47 7.261,7.769 v4(7.296,7.804) ; v1(7.772,3.277) C10.1 ; C6.1@11.76,7.163 v1@12.243,7.163 ; LED1.C@13.967,4.804 13.971,4.801 v1(14.961,4.801) ; v1(18.821,4.902) 19.762,4.902 LED2.C ; C24.1 19.786,17.373 C25.1 20.777,17.399 21.514,17.399 v1(21.539,17.424)
  Top1 w0.354: v1(0.102,16.637) R22.1 ; v1(9.22,3.785) C9.1@9.22,4.547 ; Y1.2 13.963,11.442 14.361,11.84 14.486,11.84 14.711,12.065 v1(15.469,12.065) ; C36.1 v1@16.891,4.826 ; v1(19.431,10.084) C26.1 R17.2 ; v1(32.715,3.81) K1.1@33.604,3.81 ; v1(34.087,11.405) 34.087,10.516 K2.1 ; v1(34.138,9.474) K2.1@34.138,10.363 ; K1.1@34.188,4.064 v1(34.188,4.953) ; v1(34.214,2.921) K1.1@34.214,3.81 ; K2.1@34.646,10.389 v1(35.535,10.389) ; K1.1@34.722,3.962 v1(35.611,3.962)
  Top1 w0.39: C12.2 16.529,9.442 17.24,9.442 v1(17.253,9.429) ; C13.2 v1(17.253,11.004)
  Top1 w0.6: R20.1 33.446,16.586 v3@35.027,16.586
  Bottom4 w0.3: v1(11.512,17.049) 11.868,17.405 U8.8
  Bottom4 w0.5: U5.2 14.992,2.396 15.367,2.771 v4(15.367,3.327)
  other v1: 22.657,4.521 16.993,4.826 23.292,5.105 27.203,5.182 27.965,5.182 28.753,5.182 22.301,5.207 12.421,7.163 21.057,7.798 1.911,8.49 20.98,8.839 31.648,9.728 31.648,10.668 31.09,11.201 21.463,12.014 21.438,12.878 -0.985,15.068
  other v3: 11.278,3.607 35.103,16.612
IN_AM: U1.2 U3.14 | length 16.9
  Top1 w0.3: U3.14 U3.14 7.261,15.694 7.474,15.906 v1(7.474,16.414) ; v1(19.7,18.675) 19.7,18.756 19.881,18.938 19.881,19.763 U1.2
  Bottom4 w0.3: v1(7.474,16.414) 7.459,16.429 7.459,17.314 9.252,19.107 17.343,19.107 17.775,18.675 v1(19.7,18.675)
IN_AP: U1.3 U3.15 | length 19.3
  Top1 w0.3: v1(6.635,16.643) 6.61,16.618 6.61,16.008 6.759,15.859 U3.15@6.759,14.917 ; v1(20.904,18.644) 20.904,18.725 21.151,18.972 21.151,19.309 21.19,19.347 U1.3 ; U3.15@6.759,14.917 U3.15
  Bottom4 w0.3: v1(6.635,16.643) 6.693,16.7 6.693,17.361 8.845,19.513 19.781,19.513 20.593,18.701 20.847,18.701 v1(20.904,18.644)
IN_BM: U2.2 U3.12 | length 8.8
  Top1 w0.3: v1@8.896,17.43 10.06,18.594 11.634,18.594 12.174,19.134 12.174,19.179 12.274,19.279 U2.2@12.274,19.733 ; U3.12 v1(9.201,15.551)
  Bottom4 w0.3: v1(8.845,17.532) 8.845,15.906 v1(9.201,15.551)
IN_BP: U2.3 U3.13 | length 8.4
  Top1 w0.3: U3.13 7.76,15.449 10.503,18.192 12.604,18.192 13.506,19.094 13.506,19.695 U2.3@13.544,19.733
IN_PWM_A: R1.1 U3.22 | length 1.9
  Top1 w0.254: R1.1 2.927,16.135 3.25,15.812 3.25,14.926 U3.22
IN_PWM_B: R6.1 U3.21 | length 2.6
  Top1 w0.254: U3.21 3.77,14.926 3.77,15.784 4.019,16.033 4.502,16.033 R6.1
MT6816_AUX_CS: U3.17
MT6816_CS: U3.38 U8.1 | length 24.5
  Top1 w0.2: v1(2.749,7.804) 2.755,7.798 2.755,6.539 U3.38
  Bottom4 w0.2: v1(2.749,7.804) 2.673,7.88 2.673,11.03 5.559,13.916 8.394,13.916 9.988,15.51 9.988,16.491 11.995,18.497 17.456,18.497 17.85,18.103 17.85,17.544 17.989,17.405 U8.1
NetC1_2: C1.2 R1.2 R2.1 | length 2.2
  Top1 w0.254: C1.2 R1.2 3.562,18.294 R2.1@3.562,18.65
NetC4_2: C4.2 R6.2 R7.1 | length 2.2
  Top1 w0.254: R7.1 4.502,18.7 4.502,18.319 4.299,18.116 4.299,17.786 C4.2 R6.2
NetC9_2: C9.2 R10.1 U3.7 | length 8.5
  Top1 w0.2: U3.7 8.667,10.975 8.052,10.36 8.052,7.848 9.22,6.68 C9.2 R10.1 10.973,5.486 v3@10.998,5.512
  other v3: 11.278,5.512
NetC12_1: C12.1 R19.2 U3.5 Y1.1 | length 7
  Top1 w0.2: U3.5 11.55,9.975 11.715,10.141 13.064,10.141 13.963,9.242 Y1.1 14.026,9.179 14.301,9.455 C12.1
NetC13_1: C13.1 R19.1 U3.6 Y1.3 | length 7.4
  Top1 w0.2: U3.6 9.219,10.493 11.407,10.493 11.411,10.496 11.668,10.496 Y1.3@12.363,11.192 ; Y1.3 Y1.3@12.363,11.192 ; C13.1 14.789,10.293 13.339,10.293 13.189,10.442 13.113,10.442 Y1.3@12.363,11.192
NetC15_1: C15.1 C17.1 D3.2 L1.1 U6.6
NetC15_2: C15.2 C17.2 U6.1
NetC16_2: C16.2 R13.1 R14.2 U6.3 | length 6.4
  Top1 w0.3: R13.1 C16.2 R14.2 v1(30.556,9.398) ; U6.3 29.035,12.09 v1(30.023,12.09)
  Bottom4 w0.3: v1(30.023,12.09) 30.023,9.931 v1(30.556,9.398)
NetC20_2: C20.2 D4.2 R15.1 U6.5
NetC23_2: C23.2 R21.1 U3.9 | length 3.2
  Top1 w0.3: U3.9 U3.9 10.02,11.976 10.287,12.243 10.439,12.243 C23.2 11.58,13.383 11.631,13.383 R21.1
NetC35_2: C35.2 U7.4 | length 1.2
  Top1 w0.3: C35.2 24.908,3.546 26.054,3.546 U7.4
NetLED1_A: LED1.A R11.2 | length 2.6
  Top1 w0.2: LED1.A 13.973,6.426 14.935,6.426 15.57,5.791 R11.2
NetLED2_A: LED2.A R18.2 | length 2.6
  Top1 w0.2: R18.2 18.079,6.421 LED2.A
NetR3_1: R3.1 U1.7 | length 6.3
  Top1 w0.7: v1(18.58,27.597) 19.82,26.357 19.82,25.201 U1.7
  Bottom4 w0.7: v1(18.58,27.597) 19.732,27.597 20.99,28.855 R3.1
NetR8_1: R8.1 U2.7 | length 5.8
  Top1 w0.5: U2.7 12.274,27.006 v1(12.909,27.641)
  Bottom4 w0.7: R8.1 10.747,28.829 11.935,27.641 v1(12.909,27.641)
NetR9_1: R9.1 U3.44 | length 3.1
  Top1 w0.2: R9.1@5.289,4.248 R9.1@5.289,4.519 ; v5(5.461,3.734) R9.1 ; R9.1@5.512,4.445 5.512,5.3 5.76,5.548 U3.44
NetR12_2: R12.2 S1.1 | length 3.4
  Top1 w0.2: S1.1 21.686,0.184 21.971,-0.102 22.504,-0.102 R12.2
NetR15_2: R15.2 U6.4 | length 2.3
  Top1 w0.5: U6.4 26.894,12.132 27.534,12.772 R15.2
OLED_DC: U3.29
OLED_RES: U3.30
OUT_A+: U1.6 | length 5
  Top1 w1.27: v2(18.604,29.089) 18.624,29.089 21.006,26.707 U1.6@21.006,25.116
OUT_A-: U1.8 | length 4.8
  Top1 w1.27: v2(16.604,29.089) 16.668,29.026 16.668,27.972 18.483,26.157 U1.8@18.483,25.116
OUT_B+: U2.6 | length 4.5
  Top1 w1.143: U2.6@13.544,25.033 13.544,26.727 14.517,27.7 14.517,29.002 v2(14.604,29.089)
OUT_B-: U2.8 | length 4.7
  Top1 w1.27: U2.8@11.004,25.033 11.004,26.93 11.131,27.057 11.131,27.527 12.604,29 v2(12.604,29.089)
PA10: U3.31
PC13: R11.1 U3.2 | length 7.8
  Top1 w0.16: U3.2 10.601,8.475 11.417,7.658 13.932,7.658 14.173,7.417 14.834,7.417 15.469,6.782 16.231,6.782 R11.1
PC14: R18.1 U3.3 | length 9.1
  Top1 w0.16: U3.3 10.609,8.975 11.664,7.92 14.084,7.92 14.326,7.678 15.131,7.678 15.545,7.264 16.993,7.264 R18.1
PC15: U3.4
PGND: C11.2 C14.2 C27.1 C28.1 C29.2 C30.2 C31.2 C32.2 C33.2 C34.2 D2.1 P3.2 P3.3 P3.4 P5.2 P5.3 P5.4 R3.2 R8.2 R20.2 U1.1 U1.9 U2.1 U2.9
  other v1: 27.909,21.266 28.696,21.266 29.483,21.291 30.271,21.291 32.328,21.317 33.116,21.317 -1.479,21.342 -0.692,21.342 33.903,21.342 34.69,21.342 -4.248,21.393 -3.46,21.393 -2.673,21.393 12.198,21.52 13.265,21.571 20.097,21.748 20.961,21.748 27.909,22.129 28.696,22.129 29.483,22.155 30.271,22.155 32.328,22.18 33.116,22.18 -1.479,22.206 -0.692,22.206 33.903,22.206 34.69,22.206 -4.248,22.256 -3.46,22.256 -2.673,22.256 12.198,22.358 13.265,22.383 20.097,22.536 20.961,22.536 12.198,23.196 13.265,23.196 20.097,23.323 20.961,23.323 5.721,34.626 6.508,34.626 13.62,34.626 14.408,34.626 7.296,34.652 8.083,34.652 15.195,34.652 15.983,34.652 22.053,34.652 22.841,34.652 23.628,34.677 24.415,34.677 5.721,35.49 6.508,35.49 13.62,35.49 14.408,35.49 7.296,35.515 8.083,35.515 15.195,35.515 15.983,35.515 22.053,35.515 22.841,35.515 23.628,35.541 24.415,35.541
POWER_U: C26.2 R16.2 R17.1 U3.10 | length 16.9
  Top1 w0.2: v1@7.163,12.192 7.446,12.475 U3.10 ; v1(18.263,11.862) 18.326,11.798 19.367,11.798 C26.2 R17.1 20.358,11.748 20.358,12.611 R16.2
  Bottom4 w0.2: v1(7.01,12.192) 13.894,12.192 14.275,12.573 17.551,12.573 v1(18.263,11.862)
SPI1_MISO: U3.40 U8.6 | length 15.2
  Top1 w0.2: U3.40@3.759,6.535 v1@3.759,7.803
  Bottom4 w0.2: v1(3.758,7.804) 3.74,7.822 3.74,11.004 6.048,13.312 8.837,13.312 10.389,14.865 U8.6
SPI1_MOSI: U3.41 U8.5 | length 14.2
  Top1 w0.2: U3.41 4.279,6.553 4.279,8.585 v1(4.299,8.604)
  Bottom4 w0.2: v1(4.299,8.604) 4.299,11.08 6.229,13.011 8.978,13.011 9.562,13.595 U8.5
SPI1_SCK: U3.39 U8.7 | length 16.2
  Top1 w0.2: v1(3.232,8.439) 3.251,8.42 3.251,6.543 U3.39
  Bottom4 w0.2: v1(3.232,8.439) 3.232,11.03 5.816,13.614 8.712,13.614 11.233,16.135 U8.7
SPI2_MISO: U3.27
SPI2_MOSI: U3.28
SPI2_SCK: U3.26
SWCLK: P2.2 U3.37 | length 13.4
  Top1 w0.2: P2.2 -2.464,13.995 0.229,13.995 0.318,13.906 1.562,13.906 2.413,13.056 2.413,8.216 2.248,8.051 2.248,7.57 2.26,7.557 U3.37
SWDIO: P2.3 U3.34 | length 6.7
  Top1 w0.2: P2.3 -2.286,12.522 -1.016,11.252 -1.016,9.677 -0.313,8.975 U3.34
TEMP: C3.2 R4.1 R5.2 U3.11 | length 16.3
  Top1 w0.254: U3.11 9.23,13.004 9.931,13.004 10.135,13.208 10.135,16.789 11.157,17.811 13.036,17.811 13.747,18.523 C3.2 15.449,20.777 ; R4.1@16.345,22.796 R4.1 15.449,21.875 15.449,20.777 ; R5.2@16.37,20.866 R5.2 16.307,20.777 15.449,20.777
UART1_RX: P1.3 U3.43 | length 10.5
  Top1 w0.2: P1.3 -2.156,5.236 4.947,5.236 5.26,5.548 U3.43
UART1_TX: P1.1 U3.42 | length 11.6
  Top1 w0.2: P1.1 -2.235,7.607 -2.235,6.045 -1.727,5.537 4.643,5.537 4.76,5.654 U3.42
USB_DM: U3.32
USB_DP: U3.33
VCC: C11.1 C14.1 C27.2 C28.2 C29.1 C30.1 C31.1 C32.1 C33.1 C34.1 D1.2 D2.2 D4.1 R16.1 U1.5 U2.5 | length 2.2
  Top1 w0.3: R16.1 20.957,14.251 22.165,14.251 ; D4.1@22.421,14.251 D4.1
  other v1: 0.502,25.228 1.289,25.228 24.353,25.228 25.14,25.228 2.077,25.254 2.864,25.254 3.753,25.254 4.541,25.254 25.927,25.254 26.715,25.254 5.328,25.279 28.29,25.508 29.077,25.508 29.864,25.533 30.652,25.533 15.424,25.584 16.287,25.584 0.502,26.092 1.289,26.092 2.077,26.117 2.864,26.117 3.753,26.117 4.541,26.117 5.328,26.143 15.424,26.371 16.287,26.371 28.29,26.371 29.077,26.371 29.864,26.397 30.652,26.397
VCC_3V3: C6.2 C7.2 C8.2 C10.2 C21.2 C22.2 C24.2 C25.2 C36.2 R4.2 R10.2 R21.2 T2.0 U3.1 U3.24 U3.36 U3.48 U5.3 U7.5 U8.2 U8.4 | length 25
  Top1 w0.254: C8.2 -1.05,7.985 0.809,7.985 U3.36 ; C7.2 2.236,15.094 2.26,15.07 U3.24 ; C10.2@7.747,4.75 7.753,4.756 7.753,6.527 U3.48 7.76,6.379 U3.48@7.783,6.356 ; C10.2 7.823,4.851 7.899,4.928 8.331,4.928 v1(8.357,4.953) ; U3.1 10.313,7.975 10.795,7.493 C6.2@10.795,7.163 ; v1(10.77,6.579) 10.82,6.629 C6.2 ; v1(16.281,3.048) C36.2 ; R4.2 17.12,21.006 17.12,19.075 18.212,17.983 v1@18.974,17.983 ; v1(19.183,16.16) 19.249,16.227 19.656,16.227 C24.2 C24.2@19.789,16.36 ; C24.2@19.789,16.309 20.018,16.309 20.041,16.332 C25.2@20.853,16.332
  Top1 w0.3: v1@-1.6,8.026 C8.2@-1.118,8.026 ; v1@0.717,14.586 C7.2@0.717,15.068
  Top1 w0.354: v1(10.135,3.81) R10.2@10.135,4.496 ; R21.2@10.719,13.462 10.731,13.475 10.731,14.186 v1(10.744,14.199)
  Bottom4 w0.254: U5.3 16.262,3.029 v1(16.281,3.048) ; U8.4 18.197,13.642 19.052,13.642 19.386,13.976 19.386,14.92 19.183,15.123 v1(19.183,16.16) 19.17,16.148 18.163,16.148 U8.2
  other v1: 26.645,1.676 27.33,1.93 26.975,2.489 -1.778,8.026 0.717,14.408 19.025,18.059
VCC_5V: C16.1 C18.2 C19.2 L1.2 R13.2 T1.0 U7.1 U7.3
VCC_IN: D1.1 P3.1 P5.1
  other v1: 25.635,27.616 26.498,27.616 25.635,28.403 26.498,28.403 25.609,29.191 26.473,29.191 8.185,29.597 9.048,29.597 25.609,29.978 26.473,29.978 8.185,30.384 9.048,30.384 7.321,31.172 8.185,31.172 7.321,31.959 8.185,31.959
VREF_A: C2.2 R2.2 U1.4 | length 23.9
  Top1 w0.254: C2.2 2.178,18.751 ; v1(2.178,19.373) 2.178,18.751 ; R2.2 2.178,18.751 ; U1.4 22.482,19.779 22.482,18.717 v1(22.504,18.694)
  Bottom4 w0.254: v1(2.178,19.373) 2.603,18.948 7.595,18.948 8.591,19.945 21.24,19.945 v1@22.434,18.751
VREF_B: C5.2 R7.2 U2.4 | length 11.7
  Top1 w0.254: R7.2 C5.2 6.34,18.761 6.34,19.472 v1(6.35,19.482) ; U2.4@14.814,19.733 U2.4 v1@14.814,20.682
  Bottom4 w0.254: v1(6.35,19.482) 6.35,19.575 6.596,19.821 6.596,20.019 6.877,20.301 14.087,20.301 14.503,20.717 14.748,20.717 v1(14.814,20.783)
pads on no net: P4.SH1 P4.SH2 P6.SH1 P6.SH2 S1.2 S1.3 U3.18 U3.19 U5.5 U5.8 U8.3 Y1.4

## Polygon pours and split planes (outlines as drawn)
VCC on Top1 "VCC_L01_P069" (solid, pour order 69): 23.343,14.046 23.343,15.265 23.47,15.392 27.026,15.392 27.584,15.951 26.797,15.951 25.654,17.094 23.012,17.094 21.946,16.027 21.946,14.046 22.123,13.868 23.165,13.868
PGND on Top1 "PGND_L01_P078" (solid, pour order 78): 22.225,23.851 22.225,23.978 22.403,24.155 23.749,24.155 23.901,24.003 23.901,23.419 23.638,23.155 22.032,23.155 22.032,23.53 22.123,23.622
GND on Top1 "GND_L01_P077" (solid, pour order 77): 23.546,11.43 23.368,11.252 21.539,11.252 21.361,11.074 21.361,8.611 21.514,8.458 22.581,8.458 22.733,8.306 22.733,6.706 22.885,6.553 24.765,6.553 24.994,6.325 24.994,5.791 25.273,5.512 26.416,5.512 26.594,5.69 26.594,6.814 26.765,6.985 27.229,6.985 27.483,6.731 27.483,5.766 27.635,5.613 28.829,5.613 29.616,6.401 29.997,6.401 30.328,6.731 30.328,8.255 30.404,8.331 31.013,8.331 31.14,8.458 31.14,10.058 30.48,10.719 27.94,10.719 27.737,10.922 27.737,11.506 27.838,11.608 31.75,11.608 32.08,11.278 32.08,6.096 30.505,4.521 24.562,4.521 24.359,4.318 24.359,1.499 24.028,1.168 21.641,1.168 21.387,1.422 21.387,6.579 20.574,7.391 20.574,9.957 20.93,10.312 20.93,13.132 21.107,13.31 23.419,13.31 23.495,13.233 23.495,11.963 23.546,11.913
VCC_3V3 on Top1 "VCC_3V3_L01_P076" (solid, pour order 76): 24.486,3.048 26.822,3.048 26.949,3.175 26.949,4.387 27.02,4.458 28.613,4.458 28.829,4.242 28.829,2.438 27.711,1.321 24.486,1.321 24.308,1.499 24.308,2.87
NetC15_2 on Top1 "NETC15_2_L01_P074" (solid, pour order 74): 26.924,8.763 26.924,8.915 27.686,9.677 27.686,10.389 27.991,10.693 29.718,10.693 29.82,10.592 29.82,9.754 29.667,9.601 28.575,9.601 27.991,9.017 27.991,7.645 27.889,7.544 27,7.544 26.924,7.62 26.924,8.903 27.013,8.992
NetC15_1 on Top1 "NETC15_1_L01_P073" (solid, pour order 73): 26.06,8.128 25.73,8.458 25.73,9.322 25.552,9.5 21.768,9.5 21.463,9.804 21.463,10.795 21.666,10.998 23.724,10.998 23.927,10.795 25.222,10.795 25.425,10.592 27.254,10.592 27.356,10.49 27.356,9.55 26.848,9.042 26.848,7.544 26.772,7.468 26.264,7.468 26.06,7.671
VCC_5V on Top1 "VCC_5V_L01_P072" (solid, pour order 72): 28.118,7.442 28.118,8.179 28.143,8.204 29.972,8.204 29.972,6.934 29.82,6.782 28.219,6.782 28.067,6.934 28.067,7.391
VCC_5V on Top1 "VCC_5V_L01_P071" (solid, pour order 71): 22.885,9.017 22.885,6.934 23.216,6.604 25.121,6.604 25.451,6.274 25.451,5.664 26.391,5.664 26.467,5.74 26.467,6.807 26.645,6.985 27.457,6.985 27.584,6.858 27.584,5.867 27.737,5.715 28.575,5.715 28.702,5.842 28.702,7.112 28.397,7.417 26.137,7.417 25.959,7.595 25.959,8.001 25.603,8.357 25.603,9.169 25.451,9.322 23.19,9.322
NetC20_2 on Top1 "NETC20_2_L01_P070" (solid, pour order 70): 26.695,15.062 26.873,14.884 26.873,13.31 26.746,13.183 25.908,13.183 25.756,13.03 25.756,11.709 25.857,11.608 27.28,11.608 27.381,11.506 27.381,10.795 27.28,10.693 25.552,10.693 25.197,11.049 24.155,11.049 23.901,11.303 23.901,14.91 24.054,15.062
PGND on Top1 "PGND_L01_P068" (solid, pour order 68): 27.788,22.606 30.15,22.606 30.531,22.987 30.531,24.409 30.937,24.816 35.941,24.816 36.017,24.74 36.017,18.771 31.852,18.771 31.852,15.748 31.674,15.57 28.219,15.57 27.94,15.85 27.94,20.396 27.661,20.676 27.661,22.606 27.673,22.619
PGND on Top1 "PGND_L01_P067" (solid, pour order 67): 1.581,27.463 6.28,27.463 6.299,27.483 6.299,28.346 5.588,29.058 5.055,28.524 2.159,28.524 1.581,27.946
VCC on Top1 "VCC_L01_P065" (solid, pour order 65): 9.5,23.724 7.112,23.724 7.061,23.774 7.061,24.511 4.978,26.594 4.978,26.746 0.127,26.746 0,26.619 0,21.082 0.432,20.65 9.542,20.65 9.734,20.843 9.734,23.489 9.423,23.8
VCC on Top1 "VCC_L01_P063" (solid, pour order 63): 24.028,23.038 24.028,15.621 24.13,15.519 27.153,15.519 27.584,15.951 27.584,20.371 27.381,20.574 27.381,23.048 27.203,23.226 27.066,23.089 24.13,23.089
VCC on Top1 "VCC_L01_P061" (solid, pour order 61): 21.92,25.679 22.047,25.806 26.924,25.806 27.889,26.772 32.385,26.772 32.487,26.67 32.487,25.121 32.461,25.095 30.404,25.095 30.226,24.917 30.226,23.089 29.997,22.86 24.206,22.86 24.028,23.038 24.028,24.155 23.978,24.206 22.098,24.206 21.92,24.384
PGND on Top1 "PGND_L01_P059" (solid, pour order 59): 18.002,24.326 18.04,24.288 18.04,23.552 17.938,23.45 16.033,23.45 15.957,23.526 15.957,24.238 16.059,24.339 16.071,24.326
PGND on Top1 "PGND_L01_P055" (solid, pour order 55): 17.761,19.081 17.735,19.107 17.735,23.857 17.761,23.882 22.358,23.882 22.383,23.857 22.383,21.418 21.698,20.732 19.589,20.732 19.386,20.529 19.386,19.285 19.183,19.081 18.472,19.081
PGND on Top1 "PGND_L01_P054" (solid, pour order 54): 10.039,19.056 10.014,19.081 10.014,23.831 10.039,23.857 14.636,23.857 14.662,23.831 14.662,21.393 13.976,20.707 11.868,20.707 11.665,20.504 11.665,19.259 11.461,19.056 10.75,19.056
PGND on Top1 "PGND_L01_P052" (solid, pour order 52): -0.743,20.77 -4.833,20.77 -4.896,20.834 -4.896,31.756 -0.731,35.922 28.175,35.922 28.352,35.744 28.352,32.518 27.54,31.705 23.831,31.705 23.298,31.172 23.298,26.143 23.196,26.041 22.129,26.041 21.748,26.422 21.748,31.273 21.164,31.858 10.928,31.858 9.937,32.848 6.432,32.848 6.178,32.594 6.178,31.299 7.372,30.105 7.372,26.6 5.924,26.6 5.924,27.59 5.365,28.149 2.267,28.149 1.581,27.463 0.26,27.463 -0.502,26.701 -0.502,20.961 -0.451,20.91
VCC_IN on Top1 "VCC_IN_L01_P050" (solid, pour order 50): 23.501,30.588 23.577,30.664 26.905,30.664 27.082,30.486 27.082,26.404 26.775,26.096 23.725,26.096 23.501,26.32
VCC_IN on Top1 "VCC_IN_L01_P048" (solid, pour order 48): 7.245,24.923 9.48,24.923 10.166,25.609 10.166,31.731 9.48,32.416 7.118,32.416 6.889,32.188 6.889,31.045 7.093,30.842 7.804,30.842 7.804,26.549 7.194,25.939 7.194,25.025 7.27,24.949 7.321,25 8.718,25
VCC on Top1 "VCC_L01_P044" (solid, pour order 44): 14.281,24.441 14.281,26.27 14.738,26.727 16.719,26.727 16.999,26.447 16.999,24.568 16.872,24.441 15.817,24.441
GND on Bottom4 "GND_L04_P083" (solid, pour order 83): -5.029,20.295 23.139,20.295 23.139,15.088 32.334,15.088 32.436,15.189 32.436,17.577 32.41,17.602 35.814,17.602 36.017,17.399 36.017,2.616 35.941,2.54 33.35,2.54 32.741,3.15 29.032,3.15 26.67,0.787 4.039,0.787 1.626,3.2 1.575,3.15 -5.029,3.15 -5.029,20.295 -4.978,20.345
PGND on Bottom4 "PGND_L04_P082" (solid, pour order 82): 22.606,32.385 25.654,32.385 25.908,32.639 25.908,35.763 25.705,35.966 21.641,35.966 21.311,35.636 21.361,35.585 21.361,34.544
PGND on Bottom4 "PGND_L04_P081" (solid, pour order 81): 8.89,32.868 4.156,32.868 4.142,32.853 4.142,35.689 4.369,35.916 9.068,35.916 9.423,35.56 9.296,35.433 9.296,33.096
VCC on Bottom4 "VCC_L04_P040" (solid, pour order 40): -4.978,24.441 -4.978,26.752 35.865,26.752 35.865,24.441
PGND on Bottom4 "PGND_L04_P039" (solid, pour order 39): -4.851,20.698 -4.851,23.882 35.89,23.882 35.89,20.698
PGND on Bottom4 "PGND_L04_P057" (solid, pour order 57): 22.663,30.638 22.79,30.765 22.79,35.668 22.637,35.82 8.972,35.82 8.871,35.718 8.871,31.578 9.81,30.638
VCC_3V3 on Signal2 "VCC_3V3_L02_P079" (solid, pour order 79): 23.241,20.345 23.241,15.189 23.292,15.138 32.36,15.138 32.436,15.062 32.436,17.577 32.41,17.602 35.941,17.602 36.043,17.501 36.043,2.642 35.941,2.54 33.35,2.54 32.715,3.175 29.058,3.175 26.772,0.889 4.013,0.889 1.727,3.175 -4.953,3.175 -5.08,3.302 -5.08,20.244 -4.978,20.345
VCC_IN on Signal2 "VCC_IN_L02_P051" (solid, pour order 51): 7.677,28.886 10.471,28.886 11.919,30.334 23.831,30.334 23.882,30.384 23.882,26.854 23.78,26.752 27.006,26.752 27.032,26.727 27.032,34.017 26.828,34.22 6.94,34.22 6.788,34.067 6.788,30.918 7.474,30.232 7.474,29.14 7.702,28.911
PGND on Bottom Solder "PGND_L04_P066" (solid, pour order 66): -4.851,20.629 -4.851,23.813 35.891,23.813 35.891,20.629
GND on Gnd3 "GND_L03_P080" (solid, pour order 80): -5.029,20.295 23.139,20.295 23.139,15.291 23.241,15.189 32.309,15.189 32.436,15.062 32.436,17.577 35.865,17.577 36.093,17.348 36.093,2.692 35.992,2.591 33.401,2.591 33.35,2.54 32.741,3.15 28.88,3.15 26.67,0.94 3.962,0.94 1.727,3.175 -4.953,3.175 -4.953,20.218

## Keep-outs
Keep-Out Layer:
  lines w0.254: -5.1,-0.006 ccw(c-2.1,-0.006) -4.493,-1.816 ccw(c6.5,6.5) -1.816,-4.493 ccw(c-0.006,-2.1) -0.006,-5.1 ; -5.1,31.006 cw(c-2.1,31.006) -4.493,32.816 cw(c6.5,24.5) -1.816,35.493 cw(c-0.006,33.1) -0.006,36.1 31.006,36.1 cw(c31.006,33.1) 32.816,35.493 cw(c24.5,24.5) 35.493,32.816 cw(c33.1,31.006) 36.1,31.006 ; 0.048,-5.075 31.06,-5.075 ; 31.006,-5.1 ccw(c31.006,-2.1) 32.816,-4.493 ccw(c24.5,6.5) 35.493,-1.816 ccw(c33.1,-0.006) 36.1,-0.006

## Other copper
Top1:
  pour cut-out: 13.487,17.628 13.487,13 17.475,13 17.475,17.628
  text "L1" at -0.329,-4.139 h0.99
Signal2:
  pour cut-out: 13.189,17.938 13.189,12.858 17.761,12.858 17.761,17.938
  text "L2" at -0.329,-4.139 h0.99
Gnd3:
  pour cut-out: 13.189,17.938 13.189,12.858 17.761,12.858 17.761,17.938
  text "L3" at -0.329,-4.139 h0.99
Bottom4:
  pour cut-out: 13.189,17.938 13.189,12.858 17.761,12.858 17.761,17.938
  text "L4" at -0.329,-4.139 h0.99

## Silkscreen, mask and mechanical layers (free items; w line width, h text height)
Top Overlay:
  lines w0.254: 26.518,7.468 26.742,7.244 28.443,7.244 29.616,6.071 29.616,5.867
  text "+" at 11.36,35.998 h5.08 r270
  text "+" at 27.844,35.998 h5.08 r270
  text "24V" at 15.534,33.437 h1.8
  text "B-B+A-A+" at 12.031,30.041 h1.5
  text "SWDIO SWCLK" at -0.254,11.004 h1.14 r90
  text "RST" at 13.283,3.141 h1.14 r90
  text "IN  CAN OUT" at 9.534,-4.775 h2
Bottom Overlay:
  text "Designed by            MUZI XIAOWEN" at 24.087,6.63 h2
Mechanical 1:
  lines w0.254: -5.046,0.019 ccw(c-2.046,0.019) -4.439,-1.791 ccw(c6.554,6.525) -1.762,-4.468 ccw(c0.048,-2.075) 0.048,-5.075 31.06,-5.075 ccw(c31.06,-2.075) 32.869,-4.468 ccw(c24.554,6.525) 35.546,-1.791 ccw(c33.154,0.019) 36.154,0.019 36.154,31.031 ccw(c33.154,31.031) 35.546,32.84 ccw(c24.554,24.525) 32.869,35.517 ccw(c31.06,33.125) 31.06,36.125 0.048,36.125 ccw(c0.048,33.125) -1.762,35.517 ccw(c6.554,24.525) -4.439,32.84 ccw(c-2.046,31.031) -5.046,31.031 -5.046,0.019
Mechanical 13:
  lines w0.254: -5.046,31.031 ccw(c-5.046,31.031) -5.046,31.031 ; 36.154,0.019 ccw(c36.154,0.019) 36.154,0.019

## Text inside footprints (layer, text, board x,y; h text height)
S1: Top Overlay "ON" at 16.277,0.111 h0.33 r180; Top Overlay "ON" at 16.277,1.635 h0.33 r180; Top Overlay "1" at 13.275,1.166 h0.52 r270; Top Overlay "2" at 13.288,-0.321 h0.52 r270